# EAGLE board PWM_Block-Panel-v10 (EAGLE 6.6.0), part 1 of 4
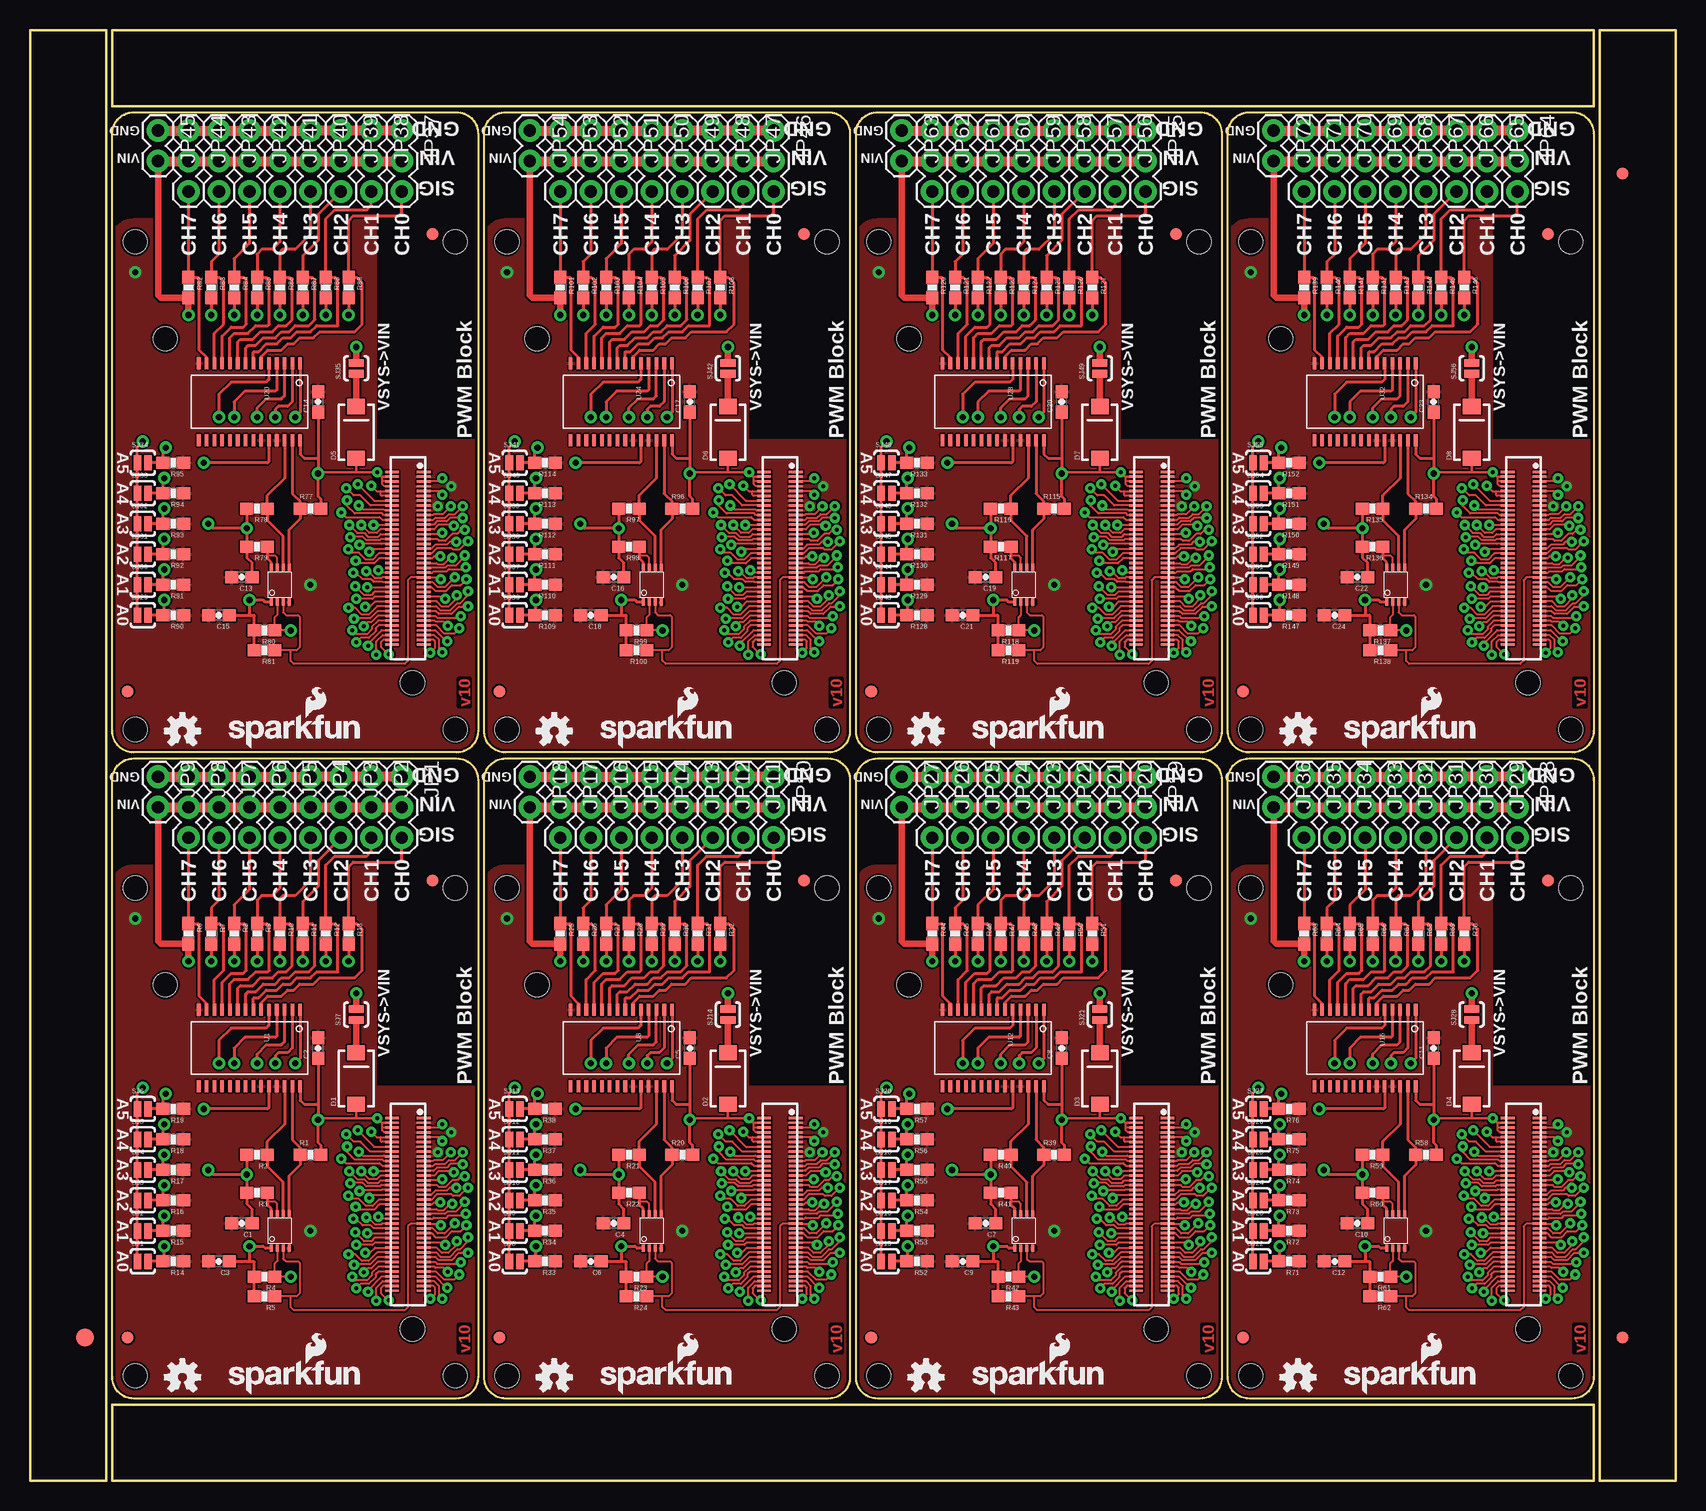
[diagram p0: board, top side]
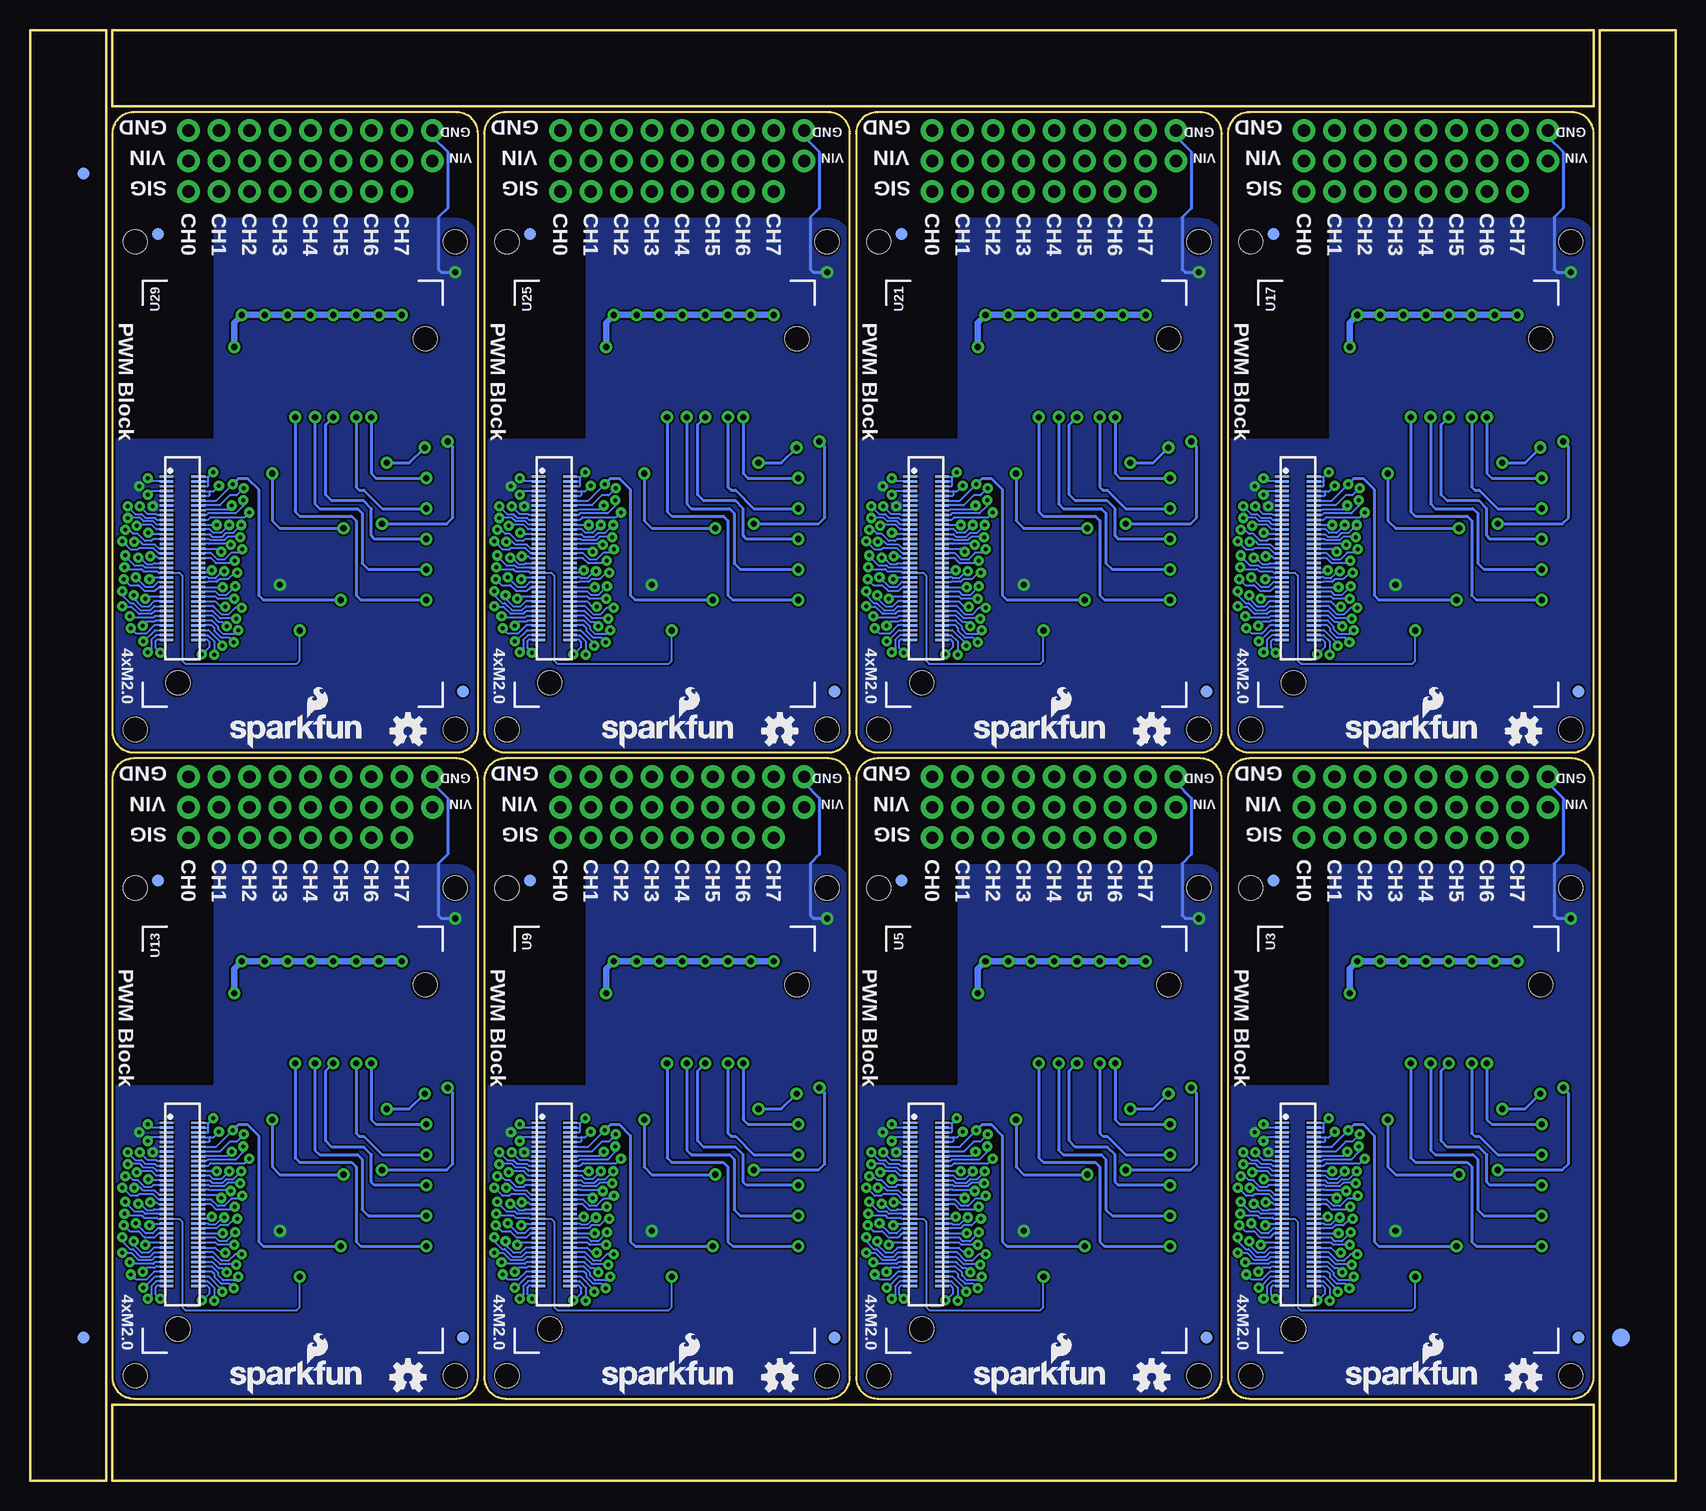
[diagram p1: board, bottom side, seen from below]

Size 137.16 x 120.9 mm. Coordinates in mm from the lower left corner, seen from the top.
Outline: 37.34,58.42 37.34,8.64 arc-90 35.56,6.86 8.64,6.86 arc-90 6.86,8.64 6.86,58.42 arc-90 8.64,60.2 35.56,60.2 arc-90 37.34,58.42
Outline: 68.33,58.42 68.33,8.64 arc-90 66.55,6.86 39.62,6.86 arc-90 37.85,8.64 37.85,58.42 arc-90 39.62,60.2 66.55,60.2 arc-90 68.33,58.42
Outline: 99.31,58.42 99.31,8.64 arc-90 97.54,6.86 70.61,6.86 arc-90 68.83,8.64 68.83,58.42 arc-90 70.61,60.2 97.54,60.2 arc-90 99.31,58.42
Outline: 130.3,58.42 130.3,8.64 arc-90 128.52,6.86 101.6,6.86 arc-90 99.82,8.64 99.82,58.42 arc-90 101.6,60.2 128.52,60.2 arc-90 130.3,58.42
Outline: 37.34,112.27 37.34,62.48 arc-90 35.56,60.71 8.64,60.71 arc-90 6.86,62.48 6.86,112.27 arc-90 8.64,114.05 35.56,114.05 arc-90 37.34,112.27
Outline: 68.33,112.27 68.33,62.48 arc-90 66.55,60.71 39.62,60.71 arc-90 37.85,62.48 37.85,112.27 arc-90 39.62,114.05 66.55,114.05 arc-90 68.33,112.27
Outline: 99.31,112.27 99.31,62.48 arc-90 97.54,60.71 70.61,60.71 arc-90 68.83,62.48 68.83,112.27 arc-90 70.61,114.05 97.54,114.05 arc-90 99.31,112.27
Outline: 130.3,112.27 130.3,62.48 arc-90 128.52,60.71 101.6,60.71 arc-90 99.82,62.48 99.82,112.27 arc-90 101.6,114.05 128.52,114.05 arc-90 130.3,112.27
Outline: 6.35,0 6.35,120.9 0,120.9 0,0 6.35,0
Outline: 6.86,0 130.3,0 130.3,6.35 6.86,6.35 6.86,0
Outline: 137.16,0 137.16,120.9 130.81,120.9 130.81,0 137.16,0
Outline: 130.3,120.9 6.86,120.9 6.86,114.55 130.3,114.55 130.3,120.9
Copper layers (1*16): Top 0.035mm / dielectric 1.5mm / Bottom 0.035mm
Design rules "SparkFun-2-layer *": minimum track width 6mil, minimum drill 13mil, track to track 6mil, track to pad 6mil, pad to pad 6mil, via to via 6mil, smd to smd 6mil, copper to edge 8mil, drill to drill 8mil, minimum pad ring 12mil, minimum via ring 10mil, stop-mask expansion 4mil, vias tented up to drill 20mil, thermal gap 6mil
Holes 2 mm at 35.43,8.76 8.76,8.76 8.76,49.4 35.43,49.4 66.42,8.76 39.75,8.76 39.75,49.4 66.42,49.4 97.41,8.76 70.74,8.76 70.74,49.4 97.41,49.4 128.4,8.76 101.73,8.76 101.73,49.4 128.4,49.4 35.43,62.61 8.76,62.61 8.76,103.25 35.43,103.25 66.42,62.61 39.75,62.61 39.75,103.25 66.42,103.25 97.41,62.61 70.74,62.61 70.74,103.25 97.41,103.25 128.4,62.61 101.73,62.61 101.73,103.25 128.4,103.25
tRestrict: area 29,33 to 37.3,51.3; area 59.9,33 to 68.3,51.3; area 90.9,33 to 99.3,51.3; area 121.9,33 to 130.3,51.3; area 29,86.9 to 37.3,105.2; area 59.9,86.9 to 68.3,105.2; area 90.9,86.9 to 99.3,105.2; area 121.9,86.9 to 130.3,105.2; 8 lines
bRestrict: area 29,33 to 37.3,51.3; area 59.9,33 to 68.3,51.3; area 90.9,33 to 99.3,51.3; area 121.9,33 to 130.3,51.3; area 29,86.9 to 37.3,105.2; area 59.9,86.9 to 68.3,105.2; area 90.9,86.9 to 99.3,105.2; area 121.9,86.9 to 130.3,105.2

## Footprints (pad centres in the part's own frame; a part is rotated, then mirrored left to right if it is on the bottom)
0603-CAP = smd 1.1 x 1: 1 -0.85,0; 2 0.85,0
SMA-DIODE = smd 1.27 x 1.47: A -2.15,0; C 2.15,0
FIDUCIAL-1.5X3 = smd 1.5 x 1.5: 1 0,0
FIDUCIAL-1X2 = smd 1 x 1: 1 0,0
1X03 = drill 1.016 pad 1.88: 1 0,0; 2 2.54,0; 3 5.08,0
1X02 = drill 1.016 pad 1.88: 1 0,0; 2 2.54,0
0603-RES = smd 1.1 x 1: 1 -0.85,0; 2 0.85,0
PAD-JUMPER-2-NO_YES_SILK = smd 0.635 x 1.27: 1 -0.45,0; 2 0.45,0
TSSOP-28_4MM = smd 1 x 0.3: 1 -3.2,4.225; 2 -3.2,3.575; 3 -3.2,2.925; 4 -3.2,2.275; 5 -3.2,1.625; 6 -3.2,0.975; 7 -3.2,0.325; 8 -3.2,-0.325; 9 -3.2,-0.975; 10 -3.2,-1.625; 11 -3.2,-2.275; 12 -3.2,-2.925; 13 -3.2,-3.575; 14 -3.2,-4.225; 15 3.2,-4.225; 16 3.2,-3.575; 17 3.2,-2.925; 18 3.2,-2.275; 19 3.2,-1.625; 20 3.2,-0.975; 21 3.2,-0.325; 22 3.2,0.325; 23 3.2,0.975; 24 3.2,1.625; 25 3.2,2.275; 26 3.2,2.925; 27 3.2,3.575; 28 3.2,4.225
PCA9306DC-1:1 = smd 0.25 x 0.602: 1 -0.73,-1.446; 2 -0.23,-1.446; 3 0.27,-1.446; 4 0.77,-1.446; 5 0.77,1.431; 6 0.27,1.431; 7 -0.23,1.431; 8 -0.73,1.431
EDISON_DAUGHTER = smd 1.14 x 0.2: 1 1.98,19.17; 2 4.62,19.17; 3 1.98,18.77; 4 4.62,18.77; 5 1.98,18.37; 6 4.62,18.37; 7 1.98,17.97; 8 4.62,17.97; 9 1.98,17.57; 10 4.62,17.57; 11 1.98,17.17; 12 4.62,17.17; 13 1.98,16.77; 14 4.62,16.77; 15 1.98,16.37; 16 4.62,16.37; 17 1.98,15.97; 18 4.62,15.97; 19 1.98,15.57; 20 4.62,15.57; 21 1.98,15.17; 22 4.62,15.17; 23 1.98,14.77; 24 4.62,14.77; 25 1.98,14.37; 26 4.62,14.37; 27 1.98,13.97; 28 4.62,13.97; 29 1.98,13.57; 30 4.62,13.57; 31 1.98,13.17; 32 4.62,13.17; 33 1.98,12.77; 34 4.62,12.77; 35 1.98,12.37; 36 4.62,12.37; 37 1.98,11.97; 38 4.62,11.97; 39 1.98,11.57; 40 4.62,11.57; 41 1.98,11.17; 42 4.62,11.17; 43 1.98,10.77; 44 4.62,10.77; 45 1.98,10.37; 46 4.62,10.37; 47 1.98,9.97; 48 4.62,9.97; 49 1.98,9.57; 50 4.62,9.57; 51 1.98,9.17; 52 4.62,9.17; 53 1.98,8.77; 54 4.62,8.77; 55 1.98,8.37; 56 4.62,8.37; 57 1.98,7.97; 58 4.62,7.97; 59 1.98,7.57; 60 4.62,7.57; 61 1.98,7.17; 62 4.62,7.17; 63 1.98,6.77; 64 4.62,6.77; 65 1.98,6.37; 66 4.62,6.37; 67 1.98,5.97; 68 4.62,5.97; 69 1.98,5.57; 70 4.62,5.57 | hole 2: 23.53,30.67; 2.93,1.98
DF40C-70DP-0.4(51) = smd 0.2 x 1.14 bottom: 1 6.8,1.32; 2 6.8,-1.32; 3 6.4,1.32; 4 6.4,-1.32; 5 6,1.32; 6 6,-1.32; 7 5.6,1.32; 8 5.6,-1.32; 9 5.2,1.32; 10 5.2,-1.32; 11 4.8,1.32; 12 4.8,-1.32; 13 4.4,1.32; 14 4.4,-1.32; 15 4,1.32; 16 4,-1.32; 17 3.6,1.32; 18 3.6,-1.32; 19 3.2,1.32; 20 3.2,-1.32; 21 2.8,1.32; 22 2.8,-1.32; 23 2.4,1.32; 24 2.4,-1.32; 25 2,1.32; 26 2,-1.32; 27 1.6,1.32; 28 1.6,-1.32; 29 1.2,1.32; 30 1.2,-1.32; 31 0.8,1.32; 32 0.8,-1.32; 33 0.4,1.32; 34 0.4,-1.32; 35 0,1.32; 36 0,-1.32; 37 -0.4,1.32; 38 -0.4,-1.32; 39 -0.8,1.32; 40 -0.8,-1.32; 41 -1.2,1.32; 42 -1.2,-1.32; 43 -1.6,1.32; 44 -1.6,-1.32; 45 -2,1.32; 46 -2,-1.32; 47 -2.4,1.32; 48 -2.4,-1.32; 49 -2.8,1.32; 50 -2.8,-1.32; 51 -3.2,1.32; 52 -3.2,-1.32; 53 -3.6,1.32; 54 -3.6,-1.32; 55 -4,1.32; 56 -4,-1.32; 57 -4.4,1.32; 58 -4.4,-1.32; 59 -4.8,1.32; 60 -4.8,-1.32; 61 -5.2,1.32; 62 -5.2,-1.32; 63 -5.6,1.32; 64 -5.6,-1.32; 65 -6,1.32; 66 -6,-1.32; 67 -6.4,1.32; 68 -6.4,-1.32; 69 -6.8,1.32; 70 -6.8,-1.32; NC1 7.2,1.32; NC2 7.2,-1.32; NC3 -7.2,-1.32; NC4 -7.2,1.32

## Placement (x,y rotation side)
C1  0.1uF  [0603-CAP]  17.65,21.46 180 top
C2  0.1uF  [0603-CAP]  24,36.07 90 top
C3  0.1uF  [0603-CAP]  15.75,18.29 180 top
C4  0.1uF  [0603-CAP]  48.64,21.46 180 top
C5  0.1uF  [0603-CAP]  54.99,36.07 90 top
C6  0.1uF  [0603-CAP]  46.74,18.29 180 top
C7  0.1uF  [0603-CAP]  79.63,21.46 180 top
C8  0.1uF  [0603-CAP]  85.98,36.07 90 top
C9  0.1uF  [0603-CAP]  77.72,18.29 180 top
C10  0.1uF  [0603-CAP]  110.62,21.46 180 top
C11  0.1uF  [0603-CAP]  116.97,36.07 90 top
C12  0.1uF  [0603-CAP]  108.71,18.29 180 top
C13  0.1uF  [0603-CAP]  17.65,75.31 180 top
C14  0.1uF  [0603-CAP]  24,89.92 90 top
C15  0.1uF  [0603-CAP]  15.75,72.14 180 top
C16  0.1uF  [0603-CAP]  48.64,75.31 180 top
C17  0.1uF  [0603-CAP]  54.99,89.92 90 top
C18  0.1uF  [0603-CAP]  46.74,72.14 180 top
C19  0.1uF  [0603-CAP]  79.63,75.31 180 top
C20  0.1uF  [0603-CAP]  85.98,89.92 90 top
C21  0.1uF  [0603-CAP]  77.72,72.14 180 top
C22  0.1uF  [0603-CAP]  110.62,75.31 180 top
C23  0.1uF  [0603-CAP]  116.97,89.92 90 top
C24  0.1uF  [0603-CAP]  108.71,72.14 180 top
D1  B340A  [SMA-DIODE]  27.18,33.53 90 top
D2  B340A  [SMA-DIODE]  58.17,33.53 90 top
D3  B340A  [SMA-DIODE]  89.15,33.53 90 top
D4  B340A  [SMA-DIODE]  120.14,33.53 90 top
D5  B340A  [SMA-DIODE]  27.18,87.38 90 top
D6  B340A  [SMA-DIODE]  58.17,87.38 90 top
D7  B340A  [SMA-DIODE]  89.15,87.38 90 top
D8  B340A  [SMA-DIODE]  120.14,87.38 90 top
E$1  [FIDUCIAL-1.5X3]  4.57,11.94 0 top
E$2  [FIDUCIAL-1.5X3]  4.57,11.94 0 bottom
E$3  [FIDUCIAL-1X2]  132.72,108.97 180 bottom
E$4  [FIDUCIAL-1X2]  132.72,11.94 0 top
E$5  [FIDUCIAL-1X2]  132.72,11.94 0 bottom
E$6  [FIDUCIAL-1X2]  132.72,108.97 180 top
FID1  FIDUCIAL1X2  [FIDUCIAL-1X2]  8.13,11.94 0 top
FID2  FIDUCIAL1X2  [FIDUCIAL-1X2]  33.53,50.04 0 top
FID3  FIDUCIAL1X2  [FIDUCIAL-1X2]  8.13,11.94 0 bottom
FID4  FIDUCIAL1X2  [FIDUCIAL-1X2]  33.53,50.04 0 bottom
FID5  FIDUCIAL1X2  [FIDUCIAL-1X2]  39.12,11.94 0 top
FID6  FIDUCIAL1X2  [FIDUCIAL-1X2]  64.52,50.04 0 top
FID7  FIDUCIAL1X2  [FIDUCIAL-1X2]  39.12,11.94 0 bottom
FID8  FIDUCIAL1X2  [FIDUCIAL-1X2]  64.52,50.04 0 bottom
FID9  FIDUCIAL1X2  [FIDUCIAL-1X2]  70.1,11.94 0 top
FID10  FIDUCIAL1X2  [FIDUCIAL-1X2]  95.5,50.04 0 top
FID11  FIDUCIAL1X2  [FIDUCIAL-1X2]  70.1,11.94 0 bottom
FID12  FIDUCIAL1X2  [FIDUCIAL-1X2]  95.5,50.04 0 bottom
FID13  FIDUCIAL1X2  [FIDUCIAL-1X2]  101.09,11.94 0 top
FID14  FIDUCIAL1X2  [FIDUCIAL-1X2]  126.49,50.04 0 top
FID15  FIDUCIAL1X2  [FIDUCIAL-1X2]  101.09,11.94 0 bottom
FID16  FIDUCIAL1X2  [FIDUCIAL-1X2]  126.49,50.04 0 bottom
FID17  FIDUCIAL1X2  [FIDUCIAL-1X2]  8.13,65.79 0 top
FID18  FIDUCIAL1X2  [FIDUCIAL-1X2]  33.53,103.89 0 top
FID19  FIDUCIAL1X2  [FIDUCIAL-1X2]  8.13,65.79 0 bottom
FID20  FIDUCIAL1X2  [FIDUCIAL-1X2]  33.53,103.89 0 bottom
FID21  FIDUCIAL1X2  [FIDUCIAL-1X2]  39.12,65.79 0 top
FID22  FIDUCIAL1X2  [FIDUCIAL-1X2]  64.52,103.89 0 top
FID23  FIDUCIAL1X2  [FIDUCIAL-1X2]  39.12,65.79 0 bottom
FID24  FIDUCIAL1X2  [FIDUCIAL-1X2]  64.52,103.89 0 bottom
FID25  FIDUCIAL1X2  [FIDUCIAL-1X2]  70.1,65.79 0 top
FID26  FIDUCIAL1X2  [FIDUCIAL-1X2]  95.5,103.89 0 top
FID27  FIDUCIAL1X2  [FIDUCIAL-1X2]  70.1,65.79 0 bottom
FID28  FIDUCIAL1X2  [FIDUCIAL-1X2]  95.5,103.89 0 bottom
FID29  FIDUCIAL1X2  [FIDUCIAL-1X2]  101.09,65.79 0 top
FID30  FIDUCIAL1X2  [FIDUCIAL-1X2]  126.49,103.89 0 top
FID31  FIDUCIAL1X2  [FIDUCIAL-1X2]  101.09,65.79 0 bottom
FID32  FIDUCIAL1X2  [FIDUCIAL-1X2]  126.49,103.89 0 bottom
JP1  [1X03]  30.99,58.67 270 top
JP2  [1X03]  28.45,58.67 270 top
JP3  [1X03]  25.91,58.67 270 top
JP4  [1X03]  23.37,58.67 270 top
JP5  [1X03]  20.83,58.67 270 top
JP6  [1X03]  18.29,58.67 270 top
JP7  [1X03]  15.75,58.67 270 top
JP8  [1X03]  13.21,58.67 270 top
JP9  M02PTH  [1X02]  10.67,58.67 270 top
JP10  [1X03]  61.98,58.67 270 top
JP11  [1X03]  59.44,58.67 270 top
JP12  [1X03]  56.9,58.67 270 top
JP13  [1X03]  54.36,58.67 270 top
JP14  [1X03]  51.82,58.67 270 top
JP15  [1X03]  49.28,58.67 270 top
JP16  [1X03]  46.74,58.67 270 top
JP17  [1X03]  44.2,58.67 270 top
JP18  M02PTH  [1X02]  41.66,58.67 270 top
JP19  [1X03]  92.96,58.67 270 top
JP20  [1X03]  90.42,58.67 270 top
JP21  [1X03]  87.88,58.67 270 top
JP22  [1X03]  85.34,58.67 270 top
JP23  [1X03]  82.8,58.67 270 top
JP24  [1X03]  80.26,58.67 270 top
JP25  [1X03]  77.72,58.67 270 top
JP26  [1X03]  75.18,58.67 270 top
JP27  M02PTH  [1X02]  72.64,58.67 270 top
JP28  [1X03]  123.95,58.67 270 top
JP29  [1X03]  121.41,58.67 270 top
JP30  [1X03]  118.87,58.67 270 top
JP31  [1X03]  116.33,58.67 270 top
JP32  [1X03]  113.79,58.67 270 top
JP33  [1X03]  111.25,58.67 270 top
JP34  [1X03]  108.71,58.67 270 top
JP35  [1X03]  106.17,58.67 270 top
JP36  M02PTH  [1X02]  103.63,58.67 270 top
JP37  [1X03]  30.99,112.52 270 top
JP38  [1X03]  28.45,112.52 270 top
JP39  [1X03]  25.91,112.52 270 top
JP40  [1X03]  23.37,112.52 270 top
JP41  [1X03]  20.83,112.52 270 top
JP42  [1X03]  18.29,112.52 270 top
JP43  [1X03]  15.75,112.52 270 top
JP44  [1X03]  13.21,112.52 270 top
JP45  M02PTH  [1X02]  10.67,112.52 270 top
JP46  [1X03]  61.98,112.52 270 top
JP47  [1X03]  59.44,112.52 270 top
JP48  [1X03]  56.9,112.52 270 top
JP49  [1X03]  54.36,112.52 270 top
JP50  [1X03]  51.82,112.52 270 top
JP51  [1X03]  49.28,112.52 270 top
JP52  [1X03]  46.74,112.52 270 top
JP53  [1X03]  44.2,112.52 270 top
JP54  M02PTH  [1X02]  41.66,112.52 270 top
JP55  [1X03]  92.96,112.52 270 top
JP56  [1X03]  90.42,112.52 270 top
JP57  [1X03]  87.88,112.52 270 top
JP58  [1X03]  85.34,112.52 270 top
JP59  [1X03]  82.8,112.52 270 top
JP60  [1X03]  80.26,112.52 270 top
JP61  [1X03]  77.72,112.52 270 top
JP62  [1X03]  75.18,112.52 270 top
JP63  M02PTH  [1X02]  72.64,112.52 270 top
JP64  [1X03]  123.95,112.52 270 top
JP65  [1X03]  121.41,112.52 270 top
JP66  [1X03]  118.87,112.52 270 top
JP67  [1X03]  116.33,112.52 270 top
JP68  [1X03]  113.79,112.52 270 top
JP69  [1X03]  111.25,112.52 270 top
JP70  [1X03]  108.71,112.52 270 top
JP71  [1X03]  106.17,112.52 270 top
JP72  M02PTH  [1X02]  103.63,112.52 270 top
LOGO1  SFE_LOGO_NAME_FLAME.1_INCH  [SFE_LOGO_NAME_FLAME_.1]  16.13,7.11 0 top
LOGO2  OSHW-LOGOS  [OSHW-LOGO-S]  12.7,8.64 0 bottom
LOGO3  SFE_LOGO_NAME_FLAME.1_INCH  [SFE_LOGO_NAME_FLAME_.1]  27.94,7.11 0 bottom
LOGO4  OSHW-LOGOS  [OSHW-LOGO-S]  12.7,8.64 0 top
LOGO5  OSHW-LOGOS  [OSHW-LOGO-S]  43.69,8.64 0 bottom
LOGO6  SFE_LOGO_NAME_FLAME.1_INCH  [SFE_LOGO_NAME_FLAME_.1]  58.93,7.11 0 bottom
LOGO7  SFE_LOGO_NAME_FLAME.1_INCH  [SFE_LOGO_NAME_FLAME_.1]  47.12,7.11 0 top
LOGO8  OSHW-LOGOS  [OSHW-LOGO-S]  43.69,8.64 0 top
LOGO9  OSHW-LOGOS  [OSHW-LOGO-S]  74.68,8.64 0 bottom
LOGO10  SFE_LOGO_NAME_FLAME.1_INCH  [SFE_LOGO_NAME_FLAME_.1]  89.92,7.11 0 bottom
LOGO11  SFE_LOGO_NAME_FLAME.1_INCH  [SFE_LOGO_NAME_FLAME_.1]  78.11,7.11 0 top
LOGO12  OSHW-LOGOS  [OSHW-LOGO-S]  74.68,8.64 0 top
LOGO13  OSHW-LOGOS  [OSHW-LOGO-S]  105.66,8.64 0 bottom
LOGO14  SFE_LOGO_NAME_FLAME.1_INCH  [SFE_LOGO_NAME_FLAME_.1]  120.9,7.11 0 bottom
LOGO15  SFE_LOGO_NAME_FLAME.1_INCH  [SFE_LOGO_NAME_FLAME_.1]  109.09,7.11 0 top
LOGO16  OSHW-LOGOS  [OSHW-LOGO-S]  105.66,8.64 0 top
LOGO17  OSHW-LOGOS  [OSHW-LOGO-S]  12.7,62.48 0 bottom
LOGO18  SFE_LOGO_NAME_FLAME.1_INCH  [SFE_LOGO_NAME_FLAME_.1]  27.94,60.96 0 bottom
LOGO19  SFE_LOGO_NAME_FLAME.1_INCH  [SFE_LOGO_NAME_FLAME_.1]  16.13,60.96 0 top
LOGO20  OSHW-LOGOS  [OSHW-LOGO-S]  12.7,62.48 0 top
LOGO21  OSHW-LOGOS  [OSHW-LOGO-S]  43.69,62.48 0 bottom
LOGO22  SFE_LOGO_NAME_FLAME.1_INCH  [SFE_LOGO_NAME_FLAME_.1]  58.93,60.96 0 bottom
LOGO23  SFE_LOGO_NAME_FLAME.1_INCH  [SFE_LOGO_NAME_FLAME_.1]  47.12,60.96 0 top
LOGO24  OSHW-LOGOS  [OSHW-LOGO-S]  43.69,62.48 0 top
LOGO25  OSHW-LOGOS  [OSHW-LOGO-S]  74.68,62.48 0 bottom
LOGO26  SFE_LOGO_NAME_FLAME.1_INCH  [SFE_LOGO_NAME_FLAME_.1]  89.92,60.96 0 bottom
LOGO27  SFE_LOGO_NAME_FLAME.1_INCH  [SFE_LOGO_NAME_FLAME_.1]  78.11,60.96 0 top
LOGO28  OSHW-LOGOS  [OSHW-LOGO-S]  74.68,62.48 0 top
LOGO29  OSHW-LOGOS  [OSHW-LOGO-S]  105.66,62.48 0 bottom
LOGO30  SFE_LOGO_NAME_FLAME.1_INCH  [SFE_LOGO_NAME_FLAME_.1]  120.9,60.96 0 bottom
LOGO31  SFE_LOGO_NAME_FLAME.1_INCH  [SFE_LOGO_NAME_FLAME_.1]  109.09,60.96 0 top
LOGO32  OSHW-LOGOS  [OSHW-LOGO-S]  105.66,62.48 0 top
R1  10K  [0603-RES]  23.37,27.18 0 top
R2  10K  [0603-RES]  18.92,27.18 180 top
R3  200k  [0603-RES]  18.92,24 180 top
R4  DNP  [0603-RES]  19.56,17.02 180 top
R5  DNP  [0603-RES]  19.56,15.37 180 top
R6  1K  [0603-RES]  13.21,45.59 270 top
R7  1K  [0603-RES]  15.11,45.59 270 top
R8  1K  [0603-RES]  17.02,45.59 270 top
R9  1K  [0603-RES]  18.92,45.59 270 top
R10  1K  [0603-RES]  20.83,45.59 270 top
R11  1K  [0603-RES]  22.73,45.59 270 top
R12  1K  [0603-RES]  24.64,45.59 270 top
R13  1K  [0603-RES]  26.54,45.59 270 top
R14  1K  [0603-RES]  11.94,18.29 180 top
R15  1K  [0603-RES]  11.94,20.83 180 top
R16  1K  [0603-RES]  11.94,23.37 180 top
R17  1K  [0603-RES]  11.94,25.91 180 top
R18  1K  [0603-RES]  11.94,28.45 180 top
R19  1K  [0603-RES]  11.94,30.99 180 top
R20  10K  [0603-RES]  54.36,27.18 0 top
R21  10K  [0603-RES]  49.91,27.18 180 top
R22  200k  [0603-RES]  49.91,24 180 top
R23  DNP  [0603-RES]  50.55,17.02 180 top
R24  DNP  [0603-RES]  50.55,15.37 180 top
R25  1K  [0603-RES]  44.2,45.59 270 top
R26  1K  [0603-RES]  46.1,45.59 270 top
R27  1K  [0603-RES]  48.01,45.59 270 top
R28  1K  [0603-RES]  49.91,45.59 270 top
R29  1K  [0603-RES]  51.82,45.59 270 top
R30  1K  [0603-RES]  53.72,45.59 270 top
R31  1K  [0603-RES]  55.63,45.59 270 top
R32  1K  [0603-RES]  57.53,45.59 270 top
R33  1K  [0603-RES]  42.93,18.29 180 top
R34  1K  [0603-RES]  42.93,20.83 180 top
R35  1K  [0603-RES]  42.93,23.37 180 top
R36  1K  [0603-RES]  42.93,25.91 180 top
R37  1K  [0603-RES]  42.93,28.45 180 top
R38  1K  [0603-RES]  42.93,30.99 180 top
R39  10K  [0603-RES]  85.34,27.18 0 top
R40  10K  [0603-RES]  80.9,27.18 180 top
R41  200k  [0603-RES]  80.9,24 180 top
R42  DNP  [0603-RES]  81.53,17.02 180 top
R43  DNP  [0603-RES]  81.53,15.37 180 top
R44  1K  [0603-RES]  75.18,45.59 270 top
R45  1K  [0603-RES]  77.09,45.59 270 top
R46  1K  [0603-RES]  78.99,45.59 270 top
R47  1K  [0603-RES]  80.9,45.59 270 top
R48  1K  [0603-RES]  82.8,45.59 270 top
R49  1K  [0603-RES]  84.71,45.59 270 top
R50  1K  [0603-RES]  86.61,45.59 270 top
R51  1K  [0603-RES]  88.52,45.59 270 top
R52  1K  [0603-RES]  73.91,18.29 180 top
R53  1K  [0603-RES]  73.91,20.83 180 top
R54  1K  [0603-RES]  73.91,23.37 180 top
R55  1K  [0603-RES]  73.91,25.91 180 top
R56  1K  [0603-RES]  73.91,28.45 180 top
R57  1K  [0603-RES]  73.91,30.99 180 top
R58  10K  [0603-RES]  116.33,27.18 0 top
R59  10K  [0603-RES]  111.89,27.18 180 top
R60  200k  [0603-RES]  111.89,24 180 top
R61  DNP  [0603-RES]  112.52,17.02 180 top
R62  DNP  [0603-RES]  112.52,15.37 180 top
R63  1K  [0603-RES]  106.17,45.59 270 top
R64  1K  [0603-RES]  108.08,45.59 270 top
R65  1K  [0603-RES]  109.98,45.59 270 top
R66  1K  [0603-RES]  111.89,45.59 270 top
R67  1K  [0603-RES]  113.79,45.59 270 top
R68  1K  [0603-RES]  115.7,45.59 270 top
R69  1K  [0603-RES]  117.6,45.59 270 top
R70  1K  [0603-RES]  119.51,45.59 270 top
R71  1K  [0603-RES]  104.9,18.29 180 top
R72  1K  [0603-RES]  104.9,20.83 180 top
R73  1K  [0603-RES]  104.9,23.37 180 top
R74  1K  [0603-RES]  104.9,25.91 180 top
R75  1K  [0603-RES]  104.9,28.45 180 top
R76  1K  [0603-RES]  104.9,30.99 180 top
R77  10K  [0603-RES]  23.37,81.03 0 top
R78  10K  [0603-RES]  18.92,81.03 180 top
R79  200k  [0603-RES]  18.92,77.85 180 top
R80  DNP  [0603-RES]  19.56,70.87 180 top
R81  DNP  [0603-RES]  19.56,69.22 180 top
R82  1K  [0603-RES]  13.21,99.44 270 top
R83  1K  [0603-RES]  15.11,99.44 270 top
R84  1K  [0603-RES]  17.02,99.44 270 top
R85  1K  [0603-RES]  18.92,99.44 270 top
R86  1K  [0603-RES]  20.83,99.44 270 top
R87  1K  [0603-RES]  22.73,99.44 270 top
R88  1K  [0603-RES]  24.64,99.44 270 top
R89  1K  [0603-RES]  26.54,99.44 270 top
R90  1K  [0603-RES]  11.94,72.14 180 top
R91  1K  [0603-RES]  11.94,74.68 180 top
R92  1K  [0603-RES]  11.94,77.22 180 top
R93  1K  [0603-RES]  11.94,79.76 180 top
R94  1K  [0603-RES]  11.94,82.3 180 top
R95  1K  [0603-RES]  11.94,84.84 180 top
R96  10K  [0603-RES]  54.36,81.03 0 top
R97  10K  [0603-RES]  49.91,81.03 180 top
R98  200k  [0603-RES]  49.91,77.85 180 top
R99  DNP  [0603-RES]  50.55,70.87 180 top
R100  DNP  [0603-RES]  50.55,69.22 180 top
R101  1K  [0603-RES]  44.2,99.44 270 top
R102  1K  [0603-RES]  46.1,99.44 270 top
R103  1K  [0603-RES]  48.01,99.44 270 top
R104  1K  [0603-RES]  49.91,99.44 270 top
R105  1K  [0603-RES]  51.82,99.44 270 top
R106  1K  [0603-RES]  53.72,99.44 270 top
R107  1K  [0603-RES]  55.63,99.44 270 top
R108  1K  [0603-RES]  57.53,99.44 270 top
R109  1K  [0603-RES]  42.93,72.14 180 top
R110  1K  [0603-RES]  42.93,74.68 180 top
R111  1K  [0603-RES]  42.93,77.22 180 top
R112  1K  [0603-RES]  42.93,79.76 180 top
R113  1K  [0603-RES]  42.93,82.3 180 top
R114  1K  [0603-RES]  42.93,84.84 180 top
R115  10K  [0603-RES]  85.34,81.03 0 top
R116  10K  [0603-RES]  80.9,81.03 180 top
R117  200k  [0603-RES]  80.9,77.85 180 top
R118  DNP  [0603-RES]  81.53,70.87 180 top
R119  DNP  [0603-RES]  81.53,69.22 180 top
R120  1K  [0603-RES]  75.18,99.44 270 top
R121  1K  [0603-RES]  77.09,99.44 270 top
R122  1K  [0603-RES]  78.99,99.44 270 top
R123  1K  [0603-RES]  80.9,99.44 270 top
R124  1K  [0603-RES]  82.8,99.44 270 top
R125  1K  [0603-RES]  84.71,99.44 270 top
R126  1K  [0603-RES]  86.61,99.44 270 top
R127  1K  [0603-RES]  88.52,99.44 270 top
R128  1K  [0603-RES]  73.91,72.14 180 top
R129  1K  [0603-RES]  73.91,74.68 180 top
R130  1K  [0603-RES]  73.91,77.22 180 top
R131  1K  [0603-RES]  73.91,79.76 180 top
R132  1K  [0603-RES]  73.91,82.3 180 top
R133  1K  [0603-RES]  73.91,84.84 180 top
R134  10K  [0603-RES]  116.33,81.03 0 top
R135  10K  [0603-RES]  111.89,81.03 180 top
R136  200k  [0603-RES]  111.89,77.85 180 top
R137  DNP  [0603-RES]  112.52,70.87 180 top
R138  DNP  [0603-RES]  112.52,69.22 180 top
R139  1K  [0603-RES]  106.17,99.44 270 top
R140  1K  [0603-RES]  108.08,99.44 270 top
R141  1K  [0603-RES]  109.98,99.44 270 top
R142  1K  [0603-RES]  111.89,99.44 270 top
R143  1K  [0603-RES]  113.79,99.44 270 top
R144  1K  [0603-RES]  115.7,99.44 270 top
R145  1K  [0603-RES]  117.6,99.44 270 top
R146  1K  [0603-RES]  119.51,99.44 270 top
R147  1K  [0603-RES]  104.9,72.14 180 top
R148  1K  [0603-RES]  104.9,74.68 180 top
R149  1K  [0603-RES]  104.9,77.22 180 top
R150  1K  [0603-RES]  104.9,79.76 180 top
R151  1K  [0603-RES]  104.9,82.3 180 top
R152  1K  [0603-RES]  104.9,84.84 180 top
SJ1  JUMPER-PAD-2-NOYES_SILK  [PAD-JUMPER-2-NO_YES_SILK]  9.4,18.29 0 top
SJ2  JUMPER-PAD-2-NOYES_SILK  [PAD-JUMPER-2-NO_YES_SILK]  9.4,20.83 0 top
SJ3  JUMPER-PAD-2-NOYES_SILK  [PAD-JUMPER-2-NO_YES_SILK]  9.4,23.37 0 top
SJ4  JUMPER-PAD-2-NOYES_SILK  [PAD-JUMPER-2-NO_YES_SILK]  9.4,25.91 0 top
SJ5  JUMPER-PAD-2-NOYES_SILK  [PAD-JUMPER-2-NO_YES_SILK]  9.4,28.45 0 top
SJ6  JUMPER-PAD-2-NOYES_SILK  [PAD-JUMPER-2-NO_YES_SILK]  9.4,30.99 0 top
SJ7  VIN_ENABLE  [PAD-JUMPER-2-NO_YES_SILK]  27.18,38.86 90 top
SJ8  JUMPER-PAD-2-NOYES_SILK  [PAD-JUMPER-2-NO_YES_SILK]  40.39,18.29 0 top
SJ9  JUMPER-PAD-2-NOYES_SILK  [PAD-JUMPER-2-NO_YES_SILK]  40.39,20.83 0 top
SJ10  JUMPER-PAD-2-NOYES_SILK  [PAD-JUMPER-2-NO_YES_SILK]  40.39,23.37 0 top
SJ11  JUMPER-PAD-2-NOYES_SILK  [PAD-JUMPER-2-NO_YES_SILK]  40.39,25.91 0 top
SJ12  JUMPER-PAD-2-NOYES_SILK  [PAD-JUMPER-2-NO_YES_SILK]  40.39,28.45 0 top
SJ13  JUMPER-PAD-2-NOYES_SILK  [PAD-JUMPER-2-NO_YES_SILK]  40.39,30.99 0 top
SJ14  VIN_ENABLE  [PAD-JUMPER-2-NO_YES_SILK]  58.17,38.86 90 top
SJ15  JUMPER-PAD-2-NOYES_SILK  [PAD-JUMPER-2-NO_YES_SILK]  71.37,18.29 0 top
SJ16  JUMPER-PAD-2-NOYES_SILK  [PAD-JUMPER-2-NO_YES_SILK]  71.37,20.83 0 top
SJ17  JUMPER-PAD-2-NOYES_SILK  [PAD-JUMPER-2-NO_YES_SILK]  71.37,23.37 0 top
SJ18  JUMPER-PAD-2-NOYES_SILK  [PAD-JUMPER-2-NO_YES_SILK]  71.37,25.91 0 top
SJ19  JUMPER-PAD-2-NOYES_SILK  [PAD-JUMPER-2-NO_YES_SILK]  71.37,28.45 0 top
SJ20  JUMPER-PAD-2-NOYES_SILK  [PAD-JUMPER-2-NO_YES_SILK]  71.37,30.99 0 top
SJ21  VIN_ENABLE  [PAD-JUMPER-2-NO_YES_SILK]  89.15,38.86 90 top
SJ22  JUMPER-PAD-2-NOYES_SILK  [PAD-JUMPER-2-NO_YES_SILK]  102.36,18.29 0 top
SJ23  JUMPER-PAD-2-NOYES_SILK  [PAD-JUMPER-2-NO_YES_SILK]  102.36,20.83 0 top
SJ24  JUMPER-PAD-2-NOYES_SILK  [PAD-JUMPER-2-NO_YES_SILK]  102.36,23.37 0 top
SJ25  JUMPER-PAD-2-NOYES_SILK  [PAD-JUMPER-2-NO_YES_SILK]  102.36,25.91 0 top
SJ26  JUMPER-PAD-2-NOYES_SILK  [PAD-JUMPER-2-NO_YES_SILK]  102.36,28.45 0 top
SJ27  JUMPER-PAD-2-NOYES_SILK  [PAD-JUMPER-2-NO_YES_SILK]  102.36,30.99 0 top
SJ28  VIN_ENABLE  [PAD-JUMPER-2-NO_YES_SILK]  120.14,38.86 90 top
SJ29  JUMPER-PAD-2-NOYES_SILK  [PAD-JUMPER-2-NO_YES_SILK]  9.4,72.14 0 top
SJ30  JUMPER-PAD-2-NOYES_SILK  [PAD-JUMPER-2-NO_YES_SILK]  9.4,74.68 0 top
SJ31  JUMPER-PAD-2-NOYES_SILK  [PAD-JUMPER-2-NO_YES_SILK]  9.4,77.22 0 top
SJ32  JUMPER-PAD-2-NOYES_SILK  [PAD-JUMPER-2-NO_YES_SILK]  9.4,79.76 0 top
SJ33  JUMPER-PAD-2-NOYES_SILK  [PAD-JUMPER-2-NO_YES_SILK]  9.4,82.3 0 top
SJ34  JUMPER-PAD-2-NOYES_SILK  [PAD-JUMPER-2-NO_YES_SILK]  9.4,84.84 0 top
SJ35  VIN_ENABLE  [PAD-JUMPER-2-NO_YES_SILK]  27.18,92.71 90 top
SJ36  JUMPER-PAD-2-NOYES_SILK  [PAD-JUMPER-2-NO_YES_SILK]  40.39,72.14 0 top
SJ37  JUMPER-PAD-2-NOYES_SILK  [PAD-JUMPER-2-NO_YES_SILK]  40.39,74.68 0 top
SJ38  JUMPER-PAD-2-NOYES_SILK  [PAD-JUMPER-2-NO_YES_SILK]  40.39,77.22 0 top
SJ39  JUMPER-PAD-2-NOYES_SILK  [PAD-JUMPER-2-NO_YES_SILK]  40.39,79.76 0 top
SJ40  JUMPER-PAD-2-NOYES_SILK  [PAD-JUMPER-2-NO_YES_SILK]  40.39,82.3 0 top
SJ41  JUMPER-PAD-2-NOYES_SILK  [PAD-JUMPER-2-NO_YES_SILK]  40.39,84.84 0 top
SJ42  VIN_ENABLE  [PAD-JUMPER-2-NO_YES_SILK]  58.17,92.71 90 top
SJ43  JUMPER-PAD-2-NOYES_SILK  [PAD-JUMPER-2-NO_YES_SILK]  71.37,72.14 0 top
SJ44  JUMPER-PAD-2-NOYES_SILK  [PAD-JUMPER-2-NO_YES_SILK]  71.37,74.68 0 top
SJ45  JUMPER-PAD-2-NOYES_SILK  [PAD-JUMPER-2-NO_YES_SILK]  71.37,77.22 0 top
SJ46  JUMPER-PAD-2-NOYES_SILK  [PAD-JUMPER-2-NO_YES_SILK]  71.37,79.76 0 top
SJ47  JUMPER-PAD-2-NOYES_SILK  [PAD-JUMPER-2-NO_YES_SILK]  71.37,82.3 0 top
SJ48  JUMPER-PAD-2-NOYES_SILK  [PAD-JUMPER-2-NO_YES_SILK]  71.37,84.84 0 top
SJ49  VIN_ENABLE  [PAD-JUMPER-2-NO_YES_SILK]  89.15,92.71 90 top
SJ50  JUMPER-PAD-2-NOYES_SILK  [PAD-JUMPER-2-NO_YES_SILK]  102.36,72.14 0 top
SJ51  JUMPER-PAD-2-NOYES_SILK  [PAD-JUMPER-2-NO_YES_SILK]  102.36,74.68 0 top
SJ52  JUMPER-PAD-2-NOYES_SILK  [PAD-JUMPER-2-NO_YES_SILK]  102.36,77.22 0 top
SJ53  JUMPER-PAD-2-NOYES_SILK  [PAD-JUMPER-2-NO_YES_SILK]  102.36,79.76 0 top
SJ54  JUMPER-PAD-2-NOYES_SILK  [PAD-JUMPER-2-NO_YES_SILK]  102.36,82.3 0 top
SJ55  JUMPER-PAD-2-NOYES_SILK  [PAD-JUMPER-2-NO_YES_SILK]  102.36,84.84 0 top
SJ56  VIN_ENABLE  [PAD-JUMPER-2-NO_YES_SILK]  120.14,92.71 90 top
U1  PCA9685  [TSSOP-28_4MM]  18.29,36.07 270 top
U2  PCA9306  [PCA9306DC-1:1]  20.83,20.83 0 top
U3  EDISON_CONNECTOR_FULLMOUNTING_HOLES  [EDISON_DAUGHTER]  34.8,10.67 0 bottom
U4  EDISON_CONNECTOR_FULLHEADER  [DF40C-70DP-0.4(51)]  31.5,23.04 90 bottom
U5  EDISON_CONNECTOR_FULLMOUNTING_HOLES  [EDISON_DAUGHTER]  65.79,10.67 0 bottom
U6  EDISON_CONNECTOR_FULLHEADER  [DF40C-70DP-0.4(51)]  62.49,23.04 90 bottom
U7  PCA9306  [PCA9306DC-1:1]  51.82,20.83 0 top
U8  PCA9685  [TSSOP-28_4MM]  49.28,36.07 270 top
U9  EDISON_CONNECTOR_FULLMOUNTING_HOLES  [EDISON_DAUGHTER]  96.77,10.67 0 bottom
U10  EDISON_CONNECTOR_FULLHEADER  [DF40C-70DP-0.4(51)]  93.47,23.04 90 bottom
U11  PCA9306  [PCA9306DC-1:1]  82.8,20.83 0 top
U12  PCA9685  [TSSOP-28_4MM]  80.26,36.07 270 top
U13  EDISON_CONNECTOR_FULLMOUNTING_HOLES  [EDISON_DAUGHTER]  127.76,10.67 0 bottom
U14  EDISON_CONNECTOR_FULLHEADER  [DF40C-70DP-0.4(51)]  124.46,23.04 90 bottom
U15  PCA9306  [PCA9306DC-1:1]  113.79,20.83 0 top
U16  PCA9685  [TSSOP-28_4MM]  111.25,36.07 270 top
U17  EDISON_CONNECTOR_FULLMOUNTING_HOLES  [EDISON_DAUGHTER]  34.8,64.52 0 bottom
U18  EDISON_CONNECTOR_FULLHEADER  [DF40C-70DP-0.4(51)]  31.5,76.89 90 bottom
U19  PCA9306  [PCA9306DC-1:1]  20.83,74.68 0 top
U20  PCA9685  [TSSOP-28_4MM]  18.29,89.92 270 top
U21  EDISON_CONNECTOR_FULLMOUNTING_HOLES  [EDISON_DAUGHTER]  65.79,64.52 0 bottom
U22  EDISON_CONNECTOR_FULLHEADER  [DF40C-70DP-0.4(51)]  62.49,76.89 90 bottom
U23  PCA9306  [PCA9306DC-1:1]  51.82,74.68 0 top
U24  PCA9685  [TSSOP-28_4MM]  49.28,89.92 270 top
U25  EDISON_CONNECTOR_FULLMOUNTING_HOLES  [EDISON_DAUGHTER]  96.77,64.52 0 bottom
U26  EDISON_CONNECTOR_FULLHEADER  [DF40C-70DP-0.4(51)]  93.47,76.89 90 bottom
U27  PCA9306  [PCA9306DC-1:1]  82.8,74.68 0 top
U28  PCA9685  [TSSOP-28_4MM]  80.26,89.92 270 top
U29  EDISON_CONNECTOR_FULLMOUNTING_HOLES  [EDISON_DAUGHTER]  127.76,64.52 0 bottom
U30  EDISON_CONNECTOR_FULLHEADER  [DF40C-70DP-0.4(51)]  124.46,76.89 90 bottom
U31  PCA9306  [PCA9306DC-1:1]  113.79,74.68 0 top
U32  PCA9685  [TSSOP-28_4MM]  111.25,89.92 270 top

## Library data of the parts
C1-C24 = SparkFun-Capacitors; PROD_ID: CAP-00810
D1-D8 = SparkFun-DiscreteSemi; PROD_ID: DIO-09886
E$1 E$2 = SparkFun-Retired
E$3-E$6 FID1-FID32 LOGO1-LOGO32 = SparkFun-Aesthetics
JP1-JP72 = SparkFun-Connectors
R1 R2 R20 R21 R39 R40 R58 R59 R77 R78 R96 R97 R115 R116 R134 R135 = SparkFun-Resistors; PROD_ID: RES-00824
R3 R22 R41 R60 R79 R98 R117 R136 = SparkFun-Resistors; PROD_ID: RES-09385
R4 R5 R23 R24 R42 R43 R61 R62 R80 R81 R99 R100 R118 R119 R137 R138 = SparkFun-Resistors; PROD_ID: RES-08272
R6-R19 R25-R38 R44-R57 R63-R76 R82-R95 R101-R114 R120-R133 R139-R152 = SparkFun-Resistors; PROD_ID: RES-07856
SJ1-SJ56 = SparkFun-Passives
U1 U8 U12 U16 U20 U24 U28 U32 = SparkFun-DigitalIC; PROD_ID: IC-12240
U2 U7 U11 U15 U19 U23 U27 U31 = SparkFun-DigitalIC; PROD_ID: IC-10023
U3-U6 U9 U10 U13 U14 U17 U18 U21 U22 U25 U26 U29 U30 = Edison

## Nets
1.8V: C3.1 R4.2 R5.2 U2.1 U3.12 U4.12
1.8V1: C6.1 R23.2 R24.2 U5.12 U6.12 U7.1
1.8V2: C9.1 R42.2 R43.2 U9.12 U10.12 U11.1
1.8V3: C12.1 R61.2 R62.2 U13.12 U14.12 U15.1
1.8V4: C15.1 R80.2 R81.2 U17.12 U18.12 U19.1
1.8V5: C18.1 R99.2 R100.2 U21.12 U22.12 U23.1
1.8V6: C21.1 R118.2 R119.2 U25.12 U26.12 U27.1
1.8V7: C24.1 R137.2 R138.2 U29.12 U30.12 U31.1
3.3V: U3.8 U3.10 U4.8 U4.10
3.3V1: U5.8 U5.10 U6.8 U6.10
3.3V2: U9.8 U9.10 U10.8 U10.10
3.3V3: U13.8 U13.10 U14.8 U14.10
3.3V4: U17.8 U17.10 U18.8 U18.10
3.3V5: U21.8 U21.10 U22.8 U22.10
3.3V6: U25.8 U25.10 U26.8 U26.10
3.3V7: U29.8 U29.10 U30.8 U30.10
A0: R14.2 SJ1.2 U1.1
A1: R15.2 SJ2.2 U1.2
A2: R16.2 SJ3.2 U1.3
A3: R17.2 SJ4.2 U1.4
A4: R18.2 SJ5.2 U1.5
A5: R19.2 SJ6.2 U1.24
A6: R37.2 SJ12.2 U8.5
A7: R36.2 SJ11.2 U8.4
A8: R35.2 SJ10.2 U8.3
A9: R34.2 SJ9.2 U8.2
A10: R33.2 SJ8.2 U8.1
A11: R38.2 SJ13.2 U8.24
A12: R56.2 SJ19.2 U12.5
A13: R55.2 SJ18.2 U12.4
A14: R54.2 SJ17.2 U12.3
A15: R53.2 SJ16.2 U12.2
A16: R52.2 SJ15.2 U12.1
A17: R57.2 SJ20.2 U12.24
A18: R75.2 SJ26.2 U16.5
A19: R74.2 SJ25.2 U16.4
A20: R73.2 SJ24.2 U16.3
A21: R72.2 SJ23.2 U16.2
A22: R71.2 SJ22.2 U16.1
A23: R76.2 SJ27.2 U16.24
A24: R94.2 SJ33.2 U20.5
A25: R93.2 SJ32.2 U20.4
A26: R92.2 SJ31.2 U20.3
A27: R91.2 SJ30.2 U20.2
A28: R90.2 SJ29.2 U20.1
A29: R95.2 SJ34.2 U20.24
A30: R113.2 SJ40.2 U24.5
A31: R112.2 SJ39.2 U24.4
A32: R111.2 SJ38.2 U24.3
A33: R110.2 SJ37.2 U24.2
A34: R109.2 SJ36.2 U24.1
A35: R114.2 SJ41.2 U24.24
A36: R132.2 SJ47.2 U28.5
A37: R131.2 SJ46.2 U28.4
A38: R130.2 SJ45.2 U28.3
A39: R129.2 SJ44.2 U28.2
A40: R128.2 SJ43.2 U28.1
A41: R133.2 SJ48.2 U28.24
A42: R151.2 SJ54.2 U32.5
A43: R150.2 SJ53.2 U32.4
A44: R149.2 SJ52.2 U32.3
A45: R148.2 SJ51.2 U32.2
A46: R147.2 SJ50.2 U32.1
A47: R152.2 SJ55.2 U32.24
CH0: JP1.3 R13.1 U1.6
CH1: JP2.3 R12.1 U1.7
CH2: JP3.3 R11.1 U1.8
CH3: JP4.3 R10.1 U1.9
CH4: JP5.3 R9.1 U1.10
CH5: JP6.3 R8.1 U1.11
CH6: JP7.3 R7.1 U1.12
CH7: JP8.3 R6.1 U1.13
CH8: JP10.3 R32.1 U8.6
CH9: JP11.3 R31.1 U8.7
CH10: JP12.3 R30.1 U8.8
CH11: JP13.3 R29.1 U8.9
CH12: JP14.3 R28.1 U8.10
CH13: JP15.3 R27.1 U8.11
CH14: JP16.3 R26.1 U8.12
CH15: JP17.3 R25.1 U8.13
CH16: JP19.3 R51.1 U12.6
CH17: JP20.3 R50.1 U12.7
CH18: JP21.3 R49.1 U12.8
CH19: JP22.3 R48.1 U12.9
CH20: JP23.3 R47.1 U12.10
CH21: JP24.3 R46.1 U12.11
CH22: JP25.3 R45.1 U12.12
CH23: JP26.3 R44.1 U12.13
CH24: JP28.3 R70.1 U16.6
CH25: JP29.3 R69.1 U16.7
CH26: JP30.3 R68.1 U16.8
CH27: JP31.3 R67.1 U16.9
CH28: JP32.3 R66.1 U16.10
CH29: JP33.3 R65.1 U16.11
CH30: JP34.3 R64.1 U16.12
CH31: JP35.3 R63.1 U16.13
CH32: JP37.3 R89.1 U20.6
CH33: JP38.3 R88.1 U20.7
CH34: JP39.3 R87.1 U20.8
CH35: JP40.3 R86.1 U20.9
CH36: JP41.3 R85.1 U20.10
CH37: JP42.3 R84.1 U20.11
CH38: JP43.3 R83.1 U20.12
CH39: JP44.3 R82.1 U20.13
CH40: JP46.3 R108.1 U24.6
CH41: JP47.3 R107.1 U24.7
CH42: JP48.3 R106.1 U24.8
CH43: JP49.3 R105.1 U24.9
CH44: JP50.3 R104.1 U24.10
CH45: JP51.3 R103.1 U24.11
CH46: JP52.3 R102.1 U24.12
CH47: JP53.3 R101.1 U24.13
CH48: JP55.3 R127.1 U28.6
CH49: JP56.3 R126.1 U28.7
CH50: JP57.3 R125.1 U28.8
CH51: JP58.3 R124.1 U28.9
CH52: JP59.3 R123.1 U28.10
CH53: JP60.3 R122.1 U28.11
CH54: JP61.3 R121.1 U28.12
CH55: JP62.3 R120.1 U28.13
CH56: JP64.3 R146.1 U32.6
CH57: JP65.3 R145.1 U32.7
CH58: JP66.3 R144.1 U32.8
CH59: JP67.3 R143.1 U32.9
CH60: JP68.3 R142.1 U32.10
CH61: JP69.3 R141.1 U32.11
CH62: JP70.3 R140.1 U32.12
CH63: JP71.3 R139.1 U32.13
DCIN: U3.14 U4.14
DCIN1: U5.14 U6.14
DCIN2: U9.14 U10.14
DCIN3: U13.14 U14.14
DCIN4: U17.14 U18.14
DCIN5: U21.14 U22.14
DCIN6: U25.14 U26.14
DCIN7: U29.14 U30.14
FAULT: U3.19 U4.19
FAULT1: U5.19 U6.19
FAULT2: U9.19 U10.19
FAULT3: U13.19 U14.19
FAULT4: U17.19 U18.19
FAULT5: U21.19 U22.19
FAULT6: U25.19 U26.19
FAULT7: U29.19 U30.19
FW_RCVR: U3.69 U4.69
FW_RCVR1: U5.69 U6.69
FW_RCVR2: U9.69 U10.69
FW_RCVR3: U13.69 U14.69
FW_RCVR4: U17.69 U18.69
FW_RCVR5: U21.69 U22.69
FW_RCVR6: U25.69 U26.69
FW_RCVR7: U29.69 U30.69
GND: C1.2 C2.2 C3.2 JP1.1 JP2.1 JP3.1 JP4.1 JP5.1 JP6.1 JP7.1 JP8.1 JP9.1 R14.1 R15.1 R16.1 R17.1 R18.1 R19.1 U1.14 U1.23 U1.25 U2.4 U3.1 U3.5 U3.9 U3.11 U3.13 U3.15 U4.1 U4.5 U4.9 U4.11 U4.13 U4.15
GND1: C4.2 C5.2 C6.2 JP10.1 JP11.1 JP12.1 JP13.1 JP14.1 JP15.1 JP16.1 JP17.1 JP18.1 R33.1 R34.1 R35.1 R36.1 R37.1 R38.1 U5.1 U5.5 U5.9 U5.11 U5.13 U5.15 U6.1 U6.5 U6.9 U6.11 U6.13 U6.15 U7.4 U8.14 U8.23 U8.25
GND2: C7.2 C8.2 C9.2 JP19.1 JP20.1 JP21.1 JP22.1 JP23.1 JP24.1 JP25.1 JP26.1 JP27.1 R52.1 R53.1 R54.1 R55.1 R56.1 R57.1 U9.1 U9.5 U9.9 U9.11 U9.13 U9.15 U10.1 U10.5 U10.9 U10.11 U10.13 U10.15 U11.4 U12.14 U12.23 U12.25
GND3: C10.2 C11.2 C12.2 JP28.1 JP29.1 JP30.1 JP31.1 JP32.1 JP33.1 JP34.1 JP35.1 JP36.1 R71.1 R72.1 R73.1 R74.1 R75.1 R76.1 U13.1 U13.5 U13.9 U13.11 U13.13 U13.15 U14.1 U14.5 U14.9 U14.11 U14.13 U14.15 U15.4 U16.14 U16.23 U16.25
GND4: C13.2 C14.2 C15.2 JP37.1 JP38.1 JP39.1 JP40.1 JP41.1 JP42.1 JP43.1 JP44.1 JP45.1 R90.1 R91.1 R92.1 R93.1 R94.1 R95.1 U17.1 U17.5 U17.9 U17.11 U17.13 U17.15 U18.1 U18.5 U18.9 U18.11 U18.13 U18.15 U19.4 U20.14 U20.23 U20.25
GND5: C16.2 C17.2 C18.2 JP46.1 JP47.1 JP48.1 JP49.1 JP50.1 JP51.1 JP52.1 JP53.1 JP54.1 R109.1 R110.1 R111.1 R112.1 R113.1 R114.1 U21.1 U21.5 U21.9 U21.11 U21.13 U21.15 U22.1 U22.5 U22.9 U22.11 U22.13 U22.15 U23.4 U24.14 U24.23 U24.25
GND6: C19.2 C20.2 C21.2 JP55.1 JP56.1 JP57.1 JP58.1 JP59.1 JP60.1 JP61.1 JP62.1 JP63.1 R128.1 R129.1 R130.1 R131.1 R132.1 R133.1 U25.1 U25.5 U25.9 U25.11 U25.13 U25.15 U26.1 U26.5 U26.9 U26.11 U26.13 U26.15 U27.4 U28.14 U28.23 U28.25
GND7: C22.2 C23.2 C24.2 JP64.1 JP65.1 JP66.1 JP67.1 JP68.1 JP69.1 JP70.1 JP71.1 JP72.1 R147.1 R148.1 R149.1 R150.1 R151.1 R152.1 U29.1 U29.5 U29.9 U29.11 U29.13 U29.15 U30.1 U30.5 U30.9 U30.11 U30.13 U30.15 U31.4 U32.14 U32.23 U32.25
GP1: U5.48 U6.48
GP2: U5.42 U6.42
GP3: U5.34 U6.34
GP4: U5.32 U6.32
GP5: U5.30 U6.30
GP6: U5.28 U6.28
GP7: U5.26 U6.26
GP8: U5.25 U6.25
GP9: U5.24 U6.24
GP10: U9.48 U10.48
GP11: U9.42 U10.42
GP12: U9.34 U10.34
GP12_PWM0: U3.35 U4.35
GP12_PWM1: U5.35 U6.35
GP12_PWM2: U9.35 U10.35
GP12_PWM3: U13.35 U14.35
GP12_PWM4: U17.35 U18.35
GP12_PWM5: U21.35 U22.35
GP12_PWM6: U25.35 U26.35
GP12_PWM7: U29.35 U30.35
GP13: U9.32 U10.32
GP13_PWM1: U3.33 U4.33
GP13_PWM2: U5.33 U6.33
GP13_PWM3: U9.33 U10.33
GP13_PWM4: U13.33 U14.33
GP13_PWM5: U17.33 U18.33
GP13_PWM6: U21.33 U22.33
GP13_PWM7: U25.33 U26.33
GP13_PWM8: U29.33 U30.33
GP14: U3.48 U4.48
GP15: U3.42 U4.42
GP16: U9.30 U10.30
GP17: U9.28 U10.28
GP18: U9.26 U10.26
GP19: U9.25 U10.25
GP19_I2C_1_SCL: R4.1 U2.2 U3.41 U4.41
GP19_I2C_1_SCL1: R23.1 U5.41 U6.41 U7.2
GP19_I2C_1_SCL2: R42.1 U9.41 U10.41 U11.2
GP19_I2C_1_SCL3: R61.1 U13.41 U14.41 U15.2
GP19_I2C_1_SCL4: R80.1 U17.41 U18.41 U19.2
GP19_I2C_1_SCL5: R99.1 U21.41 U22.41 U23.2
GP19_I2C_1_SCL6: R118.1 U25.41 U26.41 U27.2
GP19_I2C_1_SCL7: R137.1 U29.41 U30.41 U31.2
GP20: U9.24 U10.24
GP20_I2C_1_SDA: R5.1 U2.3 U3.43 U4.43
GP20_I2C_1_SDA1: R24.1 U5.43 U6.43 U7.3
GP20_I2C_1_SDA2: R43.1 U9.43 U10.43 U11.3
GP20_I2C_1_SDA3: R62.1 U13.43 U14.43 U15.3
GP20_I2C_1_SDA4: R81.1 U17.43 U18.43 U19.3
GP20_I2C_1_SDA5: R100.1 U21.43 U22.43 U23.3
GP20_I2C_1_SDA6: R119.1 U25.43 U26.43 U27.3
GP20_I2C_1_SDA7: R138.1 U29.43 U30.43 U31.3
GP21: U13.48 U14.48
GP22: U13.42 U14.42
GP23: U13.34 U14.34
GP24: U13.32 U14.32
GP25: U13.30 U14.30
GP26: U13.28 U14.28
GP27: U13.26 U14.26
GP27_I2C_6_SCL: U3.45 U4.45
GP27_I2C_6_SCL1: U5.45 U6.45
GP27_I2C_6_SCL2: U9.45 U10.45
GP27_I2C_6_SCL3: U13.45 U14.45
GP27_I2C_6_SCL4: U17.45 U18.45
GP27_I2C_6_SCL5: U21.45 U22.45
GP27_I2C_6_SCL6: U25.45 U26.45
GP27_I2C_6_SCL7: U29.45 U30.45
GP28: U13.25 U14.25
GP28_I2C_6_SDA: U3.47 U4.47
GP28_I2C_6_SDA1: U5.47 U6.47
GP28_I2C_6_SDA2: U9.47 U10.47
GP28_I2C_6_SDA3: U13.47 U14.47
GP28_I2C_6_SDA4: U17.47 U18.47
GP28_I2C_6_SDA5: U21.47 U22.47
GP28_I2C_6_SDA6: U25.47 U26.47
GP28_I2C_6_SDA7: U29.47 U30.47
GP29: U13.24 U14.24
GP30: U17.48 U18.48
GP31: U17.42 U18.42
GP32: U17.34 U18.34
GP33: U17.32 U18.32
GP34: U17.30 U18.30
GP35: U17.28 U18.28
GP36: U17.26 U18.26
GP37: U17.25 U18.25
GP38: U17.24 U18.24
GP39: U21.48 U22.48
GP40: U21.42 U22.42
GP40_I2S_2_CLK: U3.52 U4.52
GP40_I2S_2_CLK1: U5.52 U6.52
GP40_I2S_2_CLK2: U9.52 U10.52
GP40_I2S_2_CLK3: U13.52 U14.52
GP40_I2S_2_CLK4: U17.52 U18.52
GP40_I2S_2_CLK5: U21.52 U22.52
GP40_I2S_2_CLK6: U25.52 U26.52
GP40_I2S_2_CLK7: U29.52 U30.52
GP41: U21.34 U22.34
GP41_I2S_2_FS: U3.54 U4.54
GP41_I2S_2_FS1: U5.54 U6.54
GP41_I2S_2_FS2: U9.54 U10.54
GP41_I2S_2_FS3: U13.54 U14.54
GP41_I2S_2_FS4: U17.54 U18.54
GP41_I2S_2_FS5: U21.54 U22.54
GP41_I2S_2_FS6: U25.54 U26.54
GP41_I2S_2_FS7: U29.54 U30.54
GP42: U21.32 U22.32
GP42_I2S_2_RXD: U3.50 U4.50
GP42_I2S_2_RXD1: U5.50 U6.50
GP42_I2S_2_RXD2: U9.50 U10.50
GP42_I2S_2_RXD3: U13.50 U14.50
GP42_I2S_2_RXD4: U17.50 U18.50
GP42_I2S_2_RXD5: U21.50 U22.50
GP42_I2S_2_RXD6: U25.50 U26.50
GP42_I2S_2_RXD7: U29.50 U30.50
GP43: U21.30 U22.30
GP43_I2S_2_TXD: U3.56 U4.56
GP43_I2S_2_TXD1: U5.56 U6.56
GP43_I2S_2_TXD2: U9.56 U10.56
GP43_I2S_2_TXD3: U13.56 U14.56
GP43_I2S_2_TXD4: U17.56 U18.56
GP43_I2S_2_TXD5: U21.56 U22.56
GP43_I2S_2_TXD6: U25.56 U26.56
GP43_I2S_2_TXD7: U29.56 U30.56
GP44: U3.24 U4.24
GP45: U3.26 U4.26
GP46: U3.28 U4.28
GP47: U3.30 U4.30
GP48: U3.32 U4.32
GP49: U3.34 U4.34
GP50: U21.28 U22.28
GP51: U21.26 U22.26
GP52: U21.25 U22.25
GP53: U21.24 U22.24
GP54: U25.48 U26.48
GP55: U25.42 U26.42
GP56: U25.34 U26.34
GP57: U25.32 U26.32
GP58: U25.30 U26.30
GP59: U25.28 U26.28
GP60: U25.26 U26.26
GP61: U25.25 U26.25
GP62: U25.24 U26.24
GP63: U29.48 U30.48
GP64: U29.42 U30.42
GP65: U29.34 U30.34
GP66: U29.32 U30.32
GP67: U29.30 U30.30
GP68: U29.28 U30.28
GP69: U29.26 U30.26
GP70: U29.25 U30.25
GP71: U29.24 U30.24
GP77_SD_0_CD#: U3.60 U4.60
GP77_SD_0_CD#1: U5.60 U6.60
GP77_SD_0_CD#2: U9.60 U10.60
GP77_SD_0_CD#3: U13.60 U14.60
GP77_SD_0_CD#4: U17.60 U18.60
GP77_SD_0_CD#5: U21.60 U22.60
GP77_SD_0_CD#6: U25.60 U26.60
GP77_SD_0_CD#7: U29.60 U30.60
GP78_SD_0_CLK: U3.58 U4.58
GP78_SD_0_CLK1: U5.58 U6.58
GP78_SD_0_CLK2: U9.58 U10.58
GP78_SD_0_CLK3: U13.58 U14.58
GP78_SD_0_CLK4: U17.58 U18.58
GP78_SD_0_CLK5: U21.58 U22.58
GP78_SD_0_CLK6: U25.58 U26.58
GP78_SD_0_CLK7: U29.58 U30.58
GP79_SD_0_CMD: U3.62 U4.62
GP79_SD_0_CMD1: U5.62 U6.62
GP79_SD_0_CMD2: U9.62 U10.62
GP79_SD_0_CMD3: U13.62 U14.62
GP79_SD_0_CMD4: U17.62 U18.62
GP79_SD_0_CMD5: U21.62 U22.62
GP79_SD_0_CMD6: U25.62 U26.62
GP79_SD_0_CMD7: U29.62 U30.62
GP80_SD_0_DAT0: U3.66 U4.66
GP80_SD_0_DAT1: U5.66 U6.66
GP80_SD_0_DAT2: U9.66 U10.66
GP80_SD_0_DAT3: U13.66 U14.66
GP80_SD_0_DAT4: U17.66 U18.66
GP80_SD_0_DAT5: U21.66 U22.66
GP80_SD_0_DAT6: U25.66 U26.66
GP80_SD_0_DAT7: U29.66 U30.66
GP81_SD_0_DAT1: U3.70 U4.70
GP81_SD_0_DAT2: U5.70 U6.70
GP81_SD_0_DAT3: U9.70 U10.70
GP81_SD_0_DAT4: U13.70 U14.70
GP81_SD_0_DAT5: U17.70 U18.70
GP81_SD_0_DAT6: U21.70 U22.70
GP81_SD_0_DAT7: U25.70 U26.70
GP81_SD_0_DAT8: U29.70 U30.70
GP82_SD_0_DAT1: U5.64 U6.64
GP82_SD_0_DAT2: U3.64 U4.64
GP82_SD_0_DAT3: U9.64 U10.64
GP82_SD_0_DAT4: U13.64 U14.64
GP82_SD_0_DAT5: U17.64 U18.64
GP82_SD_0_DAT6: U21.64 U22.64
GP82_SD_0_DAT7: U25.64 U26.64
GP82_SD_0_DAT8: U29.64 U30.64
GP83_SD_0_DAT1: U5.68 U6.68
GP83_SD_0_DAT2: U9.68 U10.68
GP83_SD_0_DAT3: U3.68 U4.68
GP83_SD_0_DAT4: U13.68 U14.68
GP83_SD_0_DAT5: U17.68 U18.68
GP83_SD_0_DAT6: U21.68 U22.68
GP83_SD_0_DAT7: U25.68 U26.68
GP83_SD_0_DAT8: U29.68 U30.68
GP84_SD_CLK_FB: U3.44 U4.44
GP84_SD_CLK_FB1: U5.44 U6.44
GP84_SD_CLK_FB2: U9.44 U10.44
GP84_SD_CLK_FB3: U13.44 U14.44
GP84_SD_CLK_FB4: U17.44 U18.44
GP84_SD_CLK_FB5: U21.44 U22.44
GP84_SD_CLK_FB6: U25.44 U26.44
GP84_SD_CLK_FB7: U29.44 U30.44
GP109_SPI_2_CLK: U3.55 U4.55
GP109_SPI_2_CLK1: U5.55 U6.55
GP109_SPI_2_CLK2: U9.55 U10.55
GP109_SPI_2_CLK3: U13.55 U14.55
GP109_SPI_2_CLK4: U17.55 U18.55
GP109_SPI_2_CLK5: U21.55 U22.55
GP109_SPI_2_CLK6: U25.55 U26.55
GP109_SPI_2_CLK7: U29.55 U30.55
GP110_SPI_2_FS0: U3.53 U4.53
GP110_SPI_2_FS1: U5.53 U6.53
GP110_SPI_2_FS2: U9.53 U10.53
GP110_SPI_2_FS3: U13.53 U14.53
GP110_SPI_2_FS4: U17.53 U18.53
GP110_SPI_2_FS5: U21.53 U22.53
GP110_SPI_2_FS6: U25.53 U26.53
GP110_SPI_2_FS7: U29.53 U30.53
GP111_SPI_2_FS1: U3.51 U4.51
GP111_SPI_2_FS2: U5.51 U6.51
GP111_SPI_2_FS3: U9.51 U10.51
GP111_SPI_2_FS4: U13.51 U14.51
GP111_SPI_2_FS5: U17.51 U18.51
GP111_SPI_2_FS6: U21.51 U22.51
GP111_SPI_2_FS7: U25.51 U26.51
GP111_SPI_2_FS8: U29.51 U30.51
GP114_SPI_2_RXD: U3.59 U4.59
GP114_SPI_2_RXD1: U5.59 U6.59
GP114_SPI_2_RXD2: U9.59 U10.59
GP114_SPI_2_RXD3: U13.59 U14.59
GP114_SPI_2_RXD4: U17.59 U18.59
GP114_SPI_2_RXD5: U21.59 U22.59
GP114_SPI_2_RXD6: U25.59 U26.59
GP114_SPI_2_RXD7: U29.59 U30.59
GP115_SPI_2_TXD: U3.57 U4.57
GP115_SPI_2_TXD1: U5.57 U6.57
GP115_SPI_2_TXD2: U9.57 U10.57
GP115_SPI_2_TXD3: U13.57 U14.57
GP115_SPI_2_TXD4: U17.57 U18.57
GP115_SPI_2_TXD5: U21.57 U22.57
GP115_SPI_2_TXD6: U25.57 U26.57
GP115_SPI_2_TXD7: U29.57 U30.57
GP128_UART_1_CTS: U3.65 U4.65
GP128_UART_1_CTS1: U5.65 U6.65
GP128_UART_1_CTS2: U9.65 U10.65
GP128_UART_1_CTS3: U13.65 U14.65
GP128_UART_1_CTS4: U17.65 U18.65
GP128_UART_1_CTS5: U21.65 U22.65
GP128_UART_1_CTS6: U25.65 U26.65
GP128_UART_1_CTS7: U29.65 U30.65
GP129_UART_1_RTS: U3.63 U4.63
GP129_UART_1_RTS1: U5.63 U6.63
GP129_UART_1_RTS2: U9.63 U10.63
GP129_UART_1_RTS3: U13.63 U14.63
GP129_UART_1_RTS4: U17.63 U18.63
GP129_UART_1_RTS5: U21.63 U22.63
GP129_UART_1_RTS6: U25.63 U26.63
GP129_UART_1_RTS7: U29.63 U30.63
GP130_UART_1_RX: U3.61 U4.61
GP130_UART_1_RX1: U5.61 U6.61
GP130_UART_1_RX2: U9.61 U10.61
GP130_UART_1_RX3: U13.61 U14.61
GP130_UART_1_RX4: U17.61 U18.61
GP130_UART_1_RX5: U21.61 U22.61
GP130_UART_1_RX6: U25.61 U26.61
GP130_UART_1_RX7: U29.61 U30.61
GP131_UART_1_TX: U3.46 U4.46
GP131_UART_1_TX1: U5.46 U6.46
GP131_UART_1_TX2: U9.46 U10.46
GP131_UART_1_TX3: U13.46 U14.46
GP131_UART_1_TX4: U17.46 U18.46
GP131_UART_1_TX5: U21.46 U22.46
GP131_UART_1_TX6: U25.46 U26.46
GP131_UART_1_TX7: U29.46 U30.46
GP134_UART_2_RX: U3.22 U4.22
GP134_UART_2_RX1: U5.22 U6.22
GP134_UART_2_RX2: U9.22 U10.22
GP134_UART_2_RX3: U13.22 U14.22
GP134_UART_2_RX4: U17.22 U18.22
GP134_UART_2_RX5: U21.22 U22.22
GP134_UART_2_RX6: U25.22 U26.22
GP134_UART_2_RX7: U29.22 U30.22
GP135_UART_2_TX: U3.27 U4.27
GP135_UART_2_TX1: U5.27 U6.27
GP135_UART_2_TX2: U9.27 U10.27
GP135_UART_2_TX3: U13.27 U14.27
GP135_UART_2_TX4: U17.27 U18.27
GP135_UART_2_TX5: U21.27 U22.27
GP135_UART_2_TX6: U25.27 U26.27
GP135_UART_2_TX7: U29.27 U30.27
GP165: U3.25 U4.25
GP182_PWM1: U5.37 U6.37
GP182_PWM2: U3.37 U4.37
GP182_PWM3: U9.37 U10.37
GP182_PWM4: U13.37 U14.37
GP182_PWM5: U17.37 U18.37
GP182_PWM6: U21.37 U22.37
GP182_PWM7: U25.37 U26.37
GP182_PWM8: U29.37 U30.37
GP183_PWM1: U5.39 U6.39
GP183_PWM2: U9.39 U10.39
GP183_PWM3: U3.39 U4.39
GP183_PWM4: U13.39 U14.39
GP183_PWM5: U17.39 U18.39
GP183_PWM6: U21.39 U22.39
GP183_PWM7: U25.39 U26.39
GP183_PWM8: U29.39 U30.39
HV_SCL: R2.1 U1.26 U2.6
HV_SCL1: R21.1 U7.6 U8.26
HV_SCL2: R40.1 U11.6 U12.26
HV_SCL3: R59.1 U15.6 U16.26
HV_SCL4: R78.1 U19.6 U20.26
HV_SCL5: R97.1 U23.6 U24.26
HV_SCL6: R116.1 U27.6 U28.26
HV_SCL7: R135.1 U31.6 U32.26
HV_SDA: R1.1 U1.27 U2.5
HV_SDA1: R20.1 U7.5 U8.27
HV_SDA2: R39.1 U11.5 U12.27
HV_SDA3: R58.1 U15.5 U16.27
HV_SDA4: R77.1 U19.5 U20.27
HV_SDA5: R96.1 U23.5 U24.27
HV_SDA6: R115.1 U27.5 U28.27
HV_SDA7: R134.1 U31.5 U32.27
MSIC_SLP_CLK: U3.7 U4.7
MSIC_SLP_CLK1: U5.7 U6.7
MSIC_SLP_CLK2: U9.7 U10.7
MSIC_SLP_CLK3: U13.7 U14.7
MSIC_SLP_CLK4: U17.7 U18.7
MSIC_SLP_CLK5: U21.7 U22.7
MSIC_SLP_CLK6: U25.7 U26.7
MSIC_SLP_CLK7: U29.7 U30.7
N$1: R3.1 U2.7 U2.8
N$2: D1.C SJ7.1
N$3: R22.1 U7.7 U7.8
N$4: D2.C SJ14.1
N$5: R41.1 U11.7 U11.8
N$6: D3.C SJ21.1
N$7: R60.1 U15.7 U15.8
N$8: D4.C SJ28.1
N$9: R79.1 U19.7 U19.8
N$10: D5.C SJ35.1
N$11: R98.1 U23.7 U23.8
N$12: D6.C SJ42.1
N$13: R117.1 U27.7 U27.8
N$14: D7.C SJ49.1
N$15: R136.1 U31.7 U31.8
N$16: D8.C SJ56.1
OSC_CLK_OUT: U3.67 U4.67
OSC_CLK_OUT1: U5.67 U6.67
OSC_CLK_OUT2: U9.67 U10.67
OSC_CLK_OUT3: U13.67 U14.67
OSC_CLK_OUT4: U17.67 U18.67
OSC_CLK_OUT5: U21.67 U22.67
OSC_CLK_OUT6: U25.67 U26.67
OSC_CLK_OUT7: U29.67 U30.67
PSW: U3.21 U4.21
PSW1: U5.21 U6.21
PSW2: U9.21 U10.21
PSW3: U13.21 U14.21
PSW4: U17.21 U18.21
PSW5: U21.21 U22.21
PSW6: U25.21 U26.21
PSW7: U29.21 U30.21
PWRBTN#: U3.17 U4.17
PWRBTN#1: U5.17 U6.17
PWRBTN#2: U9.17 U10.17
PWRBTN#3: U13.17 U14.17
PWRBTN#4: U17.17 U18.17
PWRBTN#5: U21.17 U22.17
PWRBTN#6: U25.17 U26.17
PWRBTN#7: U29.17 U30.17
RCVR_MODE: U3.31 U4.31
RCVR_MODE1: U5.31 U6.31
RCVR_MODE2: U9.31 U10.31
RCVR_MODE3: U13.31 U14.31
RCVR_MODE4: U17.31 U18.31
RCVR_MODE5: U21.31 U22.31
RCVR_MODE6: U25.31 U26.31
RCVR_MODE7: U29.31 U30.31
RESET_OUT#: U3.36 U4.36
RESET_OUT#1: U5.36 U6.36
RESET_OUT#2: U9.36 U10.36
RESET_OUT#3: U13.36 U14.36
RESET_OUT#4: U17.36 U18.36
RESET_OUT#5: U21.36 U22.36
RESET_OUT#6: U25.36 U26.36
RESET_OUT#7: U29.36 U30.36
USB_DN: U3.18 U4.18
USB_DN1: U5.18 U6.18
USB_DN2: U9.18 U10.18
USB_DN3: U13.18 U14.18
USB_DN4: U17.18 U18.18
USB_DN5: U21.18 U22.18
USB_DN6: U25.18 U26.18
USB_DN7: U29.18 U30.18
USB_DP: U3.16 U4.16
USB_DP1: U5.16 U6.16
USB_DP2: U9.16 U10.16
USB_DP3: U13.16 U14.16
USB_DP4: U17.16 U18.16
USB_DP5: U21.16 U22.16
USB_DP6: U25.16 U26.16
USB_DP7: U29.16 U30.16
USB_ID: U3.3 U4.3
USB_ID1: U5.3 U6.3
USB_ID2: U9.3 U10.3
USB_ID3: U13.3 U14.3
USB_ID4: U17.3 U18.3
USB_ID5: U21.3 U22.3
USB_ID6: U25.3 U26.3
USB_ID7: U29.3 U30.3
USB_VBUS: U3.20 U4.20
USB_VBUS1: U5.20 U6.20
USB_VBUS2: U9.20 U10.20
USB_VBUS3: U13.20 U14.20
USB_VBUS4: U17.20 U18.20
USB_VBUS5: U21.20 U22.20
USB_VBUS6: U25.20 U26.20
USB_VBUS7: U29.20 U30.20
V_BAT_BKUP: U3.23 U4.23
V_BAT_BKUP1: U5.23 U6.23
V_BAT_BKUP2: U9.23 U10.23
V_BAT_BKUP3: U13.23 U14.23
V_BAT_BKUP4: U17.23 U18.23
V_BAT_BKUP5: U21.23 U22.23
V_BAT_BKUP6: U25.23 U26.23
V_BAT_BKUP7: U29.23 U30.23
VCC: JP1.2 JP2.2 JP3.2 JP4.2 JP5.2 JP6.2 JP7.2 JP8.2 JP9.2 R6.2 R7.2 R8.2 R9.2 R10.2 R11.2 R12.2 R13.2 SJ7.2
VCC1: JP10.2 JP11.2 JP12.2 JP13.2 JP14.2 JP15.2 JP16.2 JP17.2 JP18.2 R25.2 R26.2 R27.2 R28.2 R29.2 R30.2 R31.2 R32.2 SJ14.2
VCC2: JP19.2 JP20.2 JP21.2 JP22.2 JP23.2 JP24.2 JP25.2 JP26.2 JP27.2 R44.2 R45.2 R46.2 R47.2 R48.2 R49.2 R50.2 R51.2 SJ21.2
VCC3: JP28.2 JP29.2 JP30.2 JP31.2 JP32.2 JP33.2 JP34.2 JP35.2 JP36.2 R63.2 R64.2 R65.2 R66.2 R67.2 R68.2 R69.2 R70.2 SJ28.2
VCC4: JP37.2 JP38.2 JP39.2 JP40.2 JP41.2 JP42.2 JP43.2 JP44.2 JP45.2 R82.2 R83.2 R84.2 R85.2 R86.2 R87.2 R88.2 R89.2 SJ35.2
VCC5: JP46.2 JP47.2 JP48.2 JP49.2 JP50.2 JP51.2 JP52.2 JP53.2 JP54.2 R101.2 R102.2 R103.2 R104.2 R105.2 R106.2 R107.2 R108.2 SJ42.2
VCC6: JP55.2 JP56.2 JP57.2 JP58.2 JP59.2 JP60.2 JP61.2 JP62.2 JP63.2 R120.2 R121.2 R122.2 R123.2 R124.2 R125.2 R126.2 R127.2 SJ49.2
VCC7: JP64.2 JP65.2 JP66.2 JP67.2 JP68.2 JP69.2 JP70.2 JP71.2 JP72.2 R139.2 R140.2 R141.2 R142.2 R143.2 R144.2 R145.2 R146.2 SJ56.2
VSYS: C1.1 C2.1 D1.A R1.2 R2.2 R3.2 SJ1.1 SJ2.1 SJ3.1 SJ4.1 SJ5.1 SJ6.1 U1.28 U3.2 U3.4 U3.6 U4.2 U4.4 U4.6
VSYS1: C4.1 C5.1 D2.A R20.2 R21.2 R22.2 SJ8.1 SJ9.1 SJ10.1 SJ11.1 SJ12.1 SJ13.1 U5.2 U5.4 U5.6 U6.2 U6.4 U6.6 U8.28
VSYS2: C7.1 C8.1 D3.A R39.2 R40.2 R41.2 SJ15.1 SJ16.1 SJ17.1 SJ18.1 SJ19.1 SJ20.1 U9.2 U9.4 U9.6 U10.2 U10.4 U10.6 U12.28
VSYS3: C10.1 C11.1 D4.A R58.2 R59.2 R60.2 SJ22.1 SJ23.1 SJ24.1 SJ25.1 SJ26.1 SJ27.1 U13.2 U13.4 U13.6 U14.2 U14.4 U14.6 U16.28
VSYS4: C13.1 C14.1 D5.A R77.2 R78.2 R79.2 SJ29.1 SJ30.1 SJ31.1 SJ32.1 SJ33.1 SJ34.1 U17.2 U17.4 U17.6 U18.2 U18.4 U18.6 U20.28
VSYS5: C16.1 C17.1 D6.A R96.2 R97.2 R98.2 SJ36.1 SJ37.1 SJ38.1 SJ39.1 SJ40.1 SJ41.1 U21.2 U21.4 U21.6 U22.2 U22.4 U22.6 U24.28
VSYS6: C19.1 C20.1 D7.A R115.2 R116.2 R117.2 SJ43.1 SJ44.1 SJ45.1 SJ46.1 SJ47.1 SJ48.1 U25.2 U25.4 U25.6 U26.2 U26.4 U26.6 U28.28
VSYS7: C22.1 C23.1 D8.A R134.2 R135.2 R136.2 SJ50.1 SJ51.1 SJ52.1 SJ53.1 SJ54.1 SJ55.1 U29.2 U29.4 U29.6 U30.2 U30.4 U30.6 U32.28

## Tracks (layer width: path | path; a pad name or v marks a point on that pad's centre or on a via)
1.8V  (via drill 0.33, 0.51)
  Top 0.152: v27.3,29.21 28.68,27.84 U4.12
  Top 0.254: R5.2 R4.2 18.71,18.24 18.66,18.29 18.29,18.29 | U2.1 19.61,19.38 19.43,19.56 v18.29,19.56 18.29,18.29 | C3.1 18.29,18.29
  Bottom 0.152: U4.12 28.68,27.84 v27.3,29.21
  Bottom 0.254: v18.29,19.56 24.77,19.56 25.15,19.94 25.15,28.78 26.04,29.67 26.85,29.67 v27.3,29.21
1.8V1  (via drill 0.33, 0.51)
  Top 0.152: v58.29,29.21 59.66,27.84 U6.12
  Top 0.254: R24.2 R23.2 49.7,18.24 49.65,18.29 49.28,18.29 | U7.1 50.59,19.38 50.42,19.56 v49.28,19.56 49.28,18.29 | C6.1 49.28,18.29
  Bottom 0.152: U6.12 59.66,27.84 v58.29,29.21
  Bottom 0.254: v49.28,19.56 55.75,19.56 56.13,19.94 56.13,28.78 57.02,29.67 57.84,29.67 v58.29,29.21
1.8V2  (via drill 0.33, 0.51)
  Top 0.152: v89.28,29.21 90.65,27.84 U10.12
  Top 0.254: R43.2 R42.2 80.68,18.24 80.64,18.29 80.26,18.29 | U11.1 81.58,19.38 81.41,19.56 v80.26,19.56 80.26,18.29 | C9.1 80.26,18.29
  Bottom 0.152: U10.12 90.65,27.84 v89.28,29.21
  Bottom 0.254: v80.26,19.56 86.74,19.56 87.12,19.94 87.12,28.78 88.01,29.67 88.82,29.67 v89.28,29.21
1.8V3  (via drill 0.33, 0.51)
  Top 0.152: v120.27,29.21 121.64,27.84 U14.12
  Top 0.254: R62.2 R61.2 111.67,18.24 111.62,18.29 111.25,18.29 | U15.1 112.57,19.38 112.39,19.56 v111.25,19.56 111.25,18.29 | C12.1 111.25,18.29
  Bottom 0.152: U14.12 121.64,27.84 v120.27,29.21
  Bottom 0.254: v111.25,19.56 117.73,19.56 118.11,19.94 118.11,28.78 119,29.67 119.81,29.67 v120.27,29.21
1.8V4  (via drill 0.33, 0.51)
  Top 0.152: v27.3,83.06 28.68,81.69 U18.12
  Top 0.254: R81.2 R80.2 18.71,72.09 18.66,72.14 18.29,72.14 | U19.1 19.61,73.23 19.43,73.41 v18.29,73.41 18.29,72.14 | C15.1 18.29,72.14
  Bottom 0.152: U18.12 28.68,81.69 v27.3,83.06
  Bottom 0.254: v18.29,73.41 24.77,73.41 25.15,73.79 25.15,82.63 26.04,83.52 26.85,83.52 v27.3,83.06
1.8V5  (via drill 0.33, 0.51)
  Top 0.152: v58.29,83.06 59.66,81.69 U22.12
  Top 0.254: R100.2 R99.2 49.7,72.09 49.65,72.14 49.28,72.14 | U23.1 50.59,73.23 50.42,73.41 v49.28,73.41 49.28,72.14 | C18.1 49.28,72.14
  Bottom 0.152: U22.12 59.66,81.69 v58.29,83.06
  Bottom 0.254: v49.28,73.41 55.75,73.41 56.13,73.79 56.13,82.63 57.02,83.52 57.84,83.52 v58.29,83.06
1.8V6  (via drill 0.33, 0.51)
  Top 0.152: v89.28,83.06 90.65,81.69 U26.12
  Top 0.254: R119.2 R118.2 80.68,72.09 80.64,72.14 80.26,72.14 | U27.1 81.58,73.23 81.41,73.41 v80.26,73.41 80.26,72.14 | C21.1 80.26,72.14
  Bottom 0.152: U26.12 90.65,81.69 v89.28,83.06
  Bottom 0.254: v80.26,73.41 86.74,73.41 87.12,73.79 87.12,82.63 88.01,83.52 88.82,83.52 v89.28,83.06
1.8V7  (via drill 0.33, 0.51)
  Top 0.152: v120.27,83.06 121.64,81.69 U30.12
  Top 0.254: R138.2 R137.2 111.67,72.09 111.62,72.14 111.25,72.14 | U31.1 112.57,73.23 112.39,73.41 v111.25,73.41 111.25,72.14 | C24.1 111.25,72.14
  Bottom 0.152: U30.12 121.64,81.69 v120.27,83.06
  Bottom 0.254: v111.25,73.41 117.73,73.41 118.11,73.79 118.11,82.63 119,83.52 119.81,83.52 v120.27,83.06
3.3V  (via drill 0.33)
  Top 0.152: v28.45,29.08 28.89,28.64 29.21,28.64 | 29.21,28.64 U4.8 | U4.10 29.29,28.24 29.21,28.32 29.21,28.64
  Bottom 0.152: U4.8 | U4.10 | U4.8 29.21,28.64 | 29.21,28.64 28.89,28.64 v28.45,29.08 | U4.10 29.29,28.24 29.21,28.32 29.21,28.64
3.3V1  (via drill 0.33)
  Top 0.152: v59.44,29.08 59.88,28.64 60.2,28.64 | 60.2,28.64 U6.8 | U6.10 60.28,28.24 60.2,28.32 60.2,28.64
  Bottom 0.152: U6.8 | U6.10 | U6.8 60.2,28.64 | 60.2,28.64 59.88,28.64 v59.44,29.08 | U6.10 60.28,28.24 60.2,28.32 60.2,28.64
3.3V2  (via drill 0.33)
  Top 0.152: v90.42,29.08 90.87,28.64 91.19,28.64 | 91.19,28.64 U10.8 | U10.10 91.27,28.24 91.19,28.32 91.19,28.64
  Bottom 0.152: U10.8 | U10.10 | U10.8 91.19,28.64 | 91.19,28.64 90.87,28.64 v90.42,29.08 | U10.10 91.27,28.24 91.19,28.32 91.19,28.64
3.3V3  (via drill 0.33)